# EAGLE board SparkFun_Air_Quality_ENS160-Panel (EAGLE 9.6.2), part 1 of 4
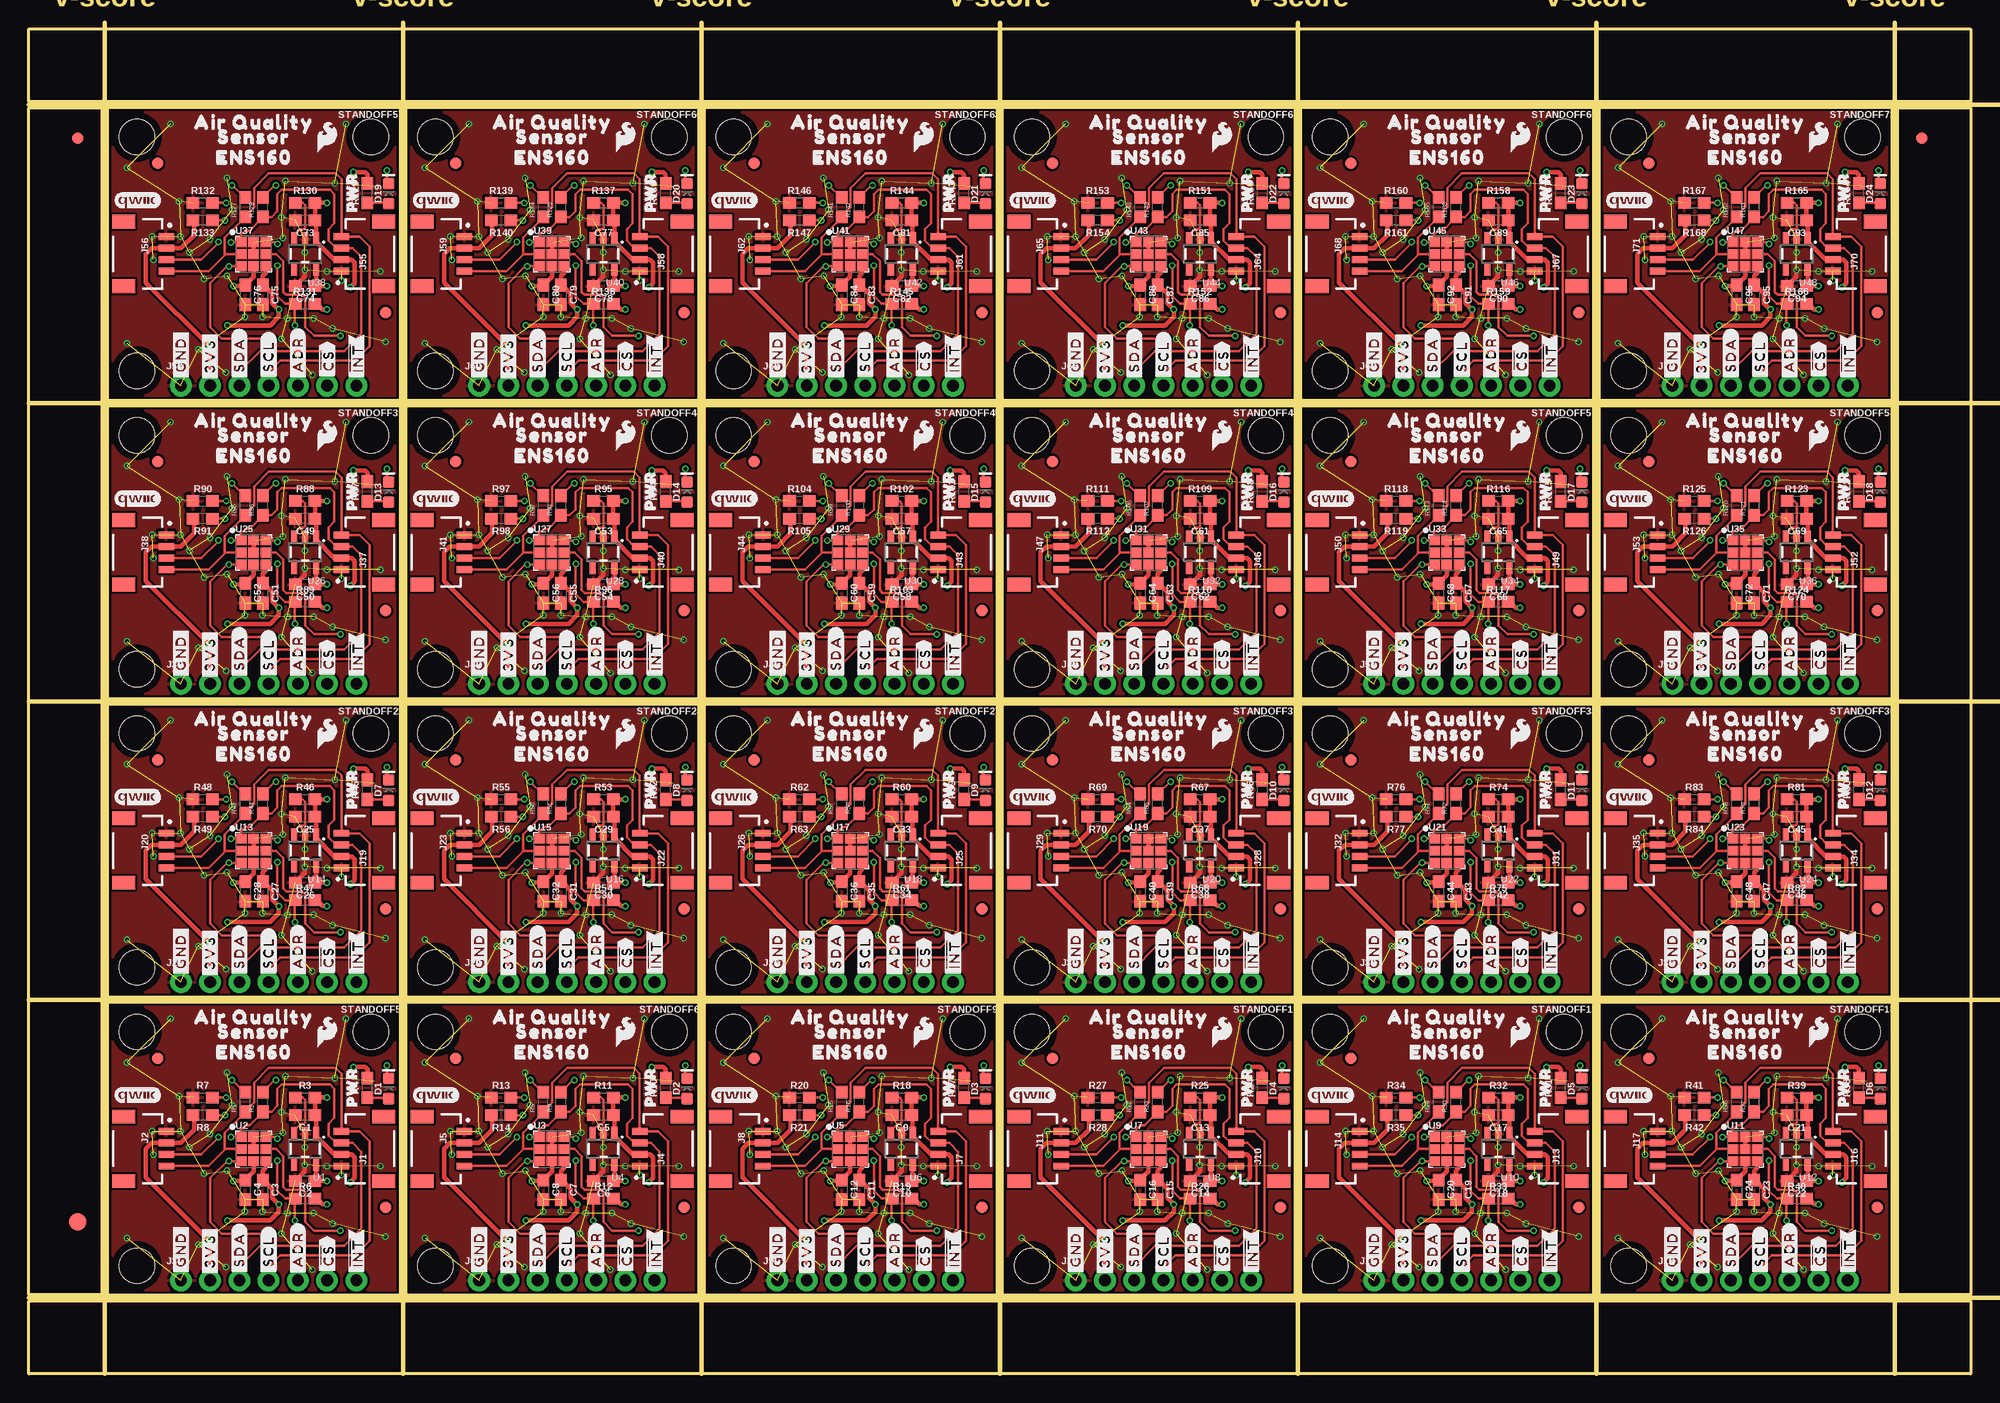
[diagram p0: board, top side]
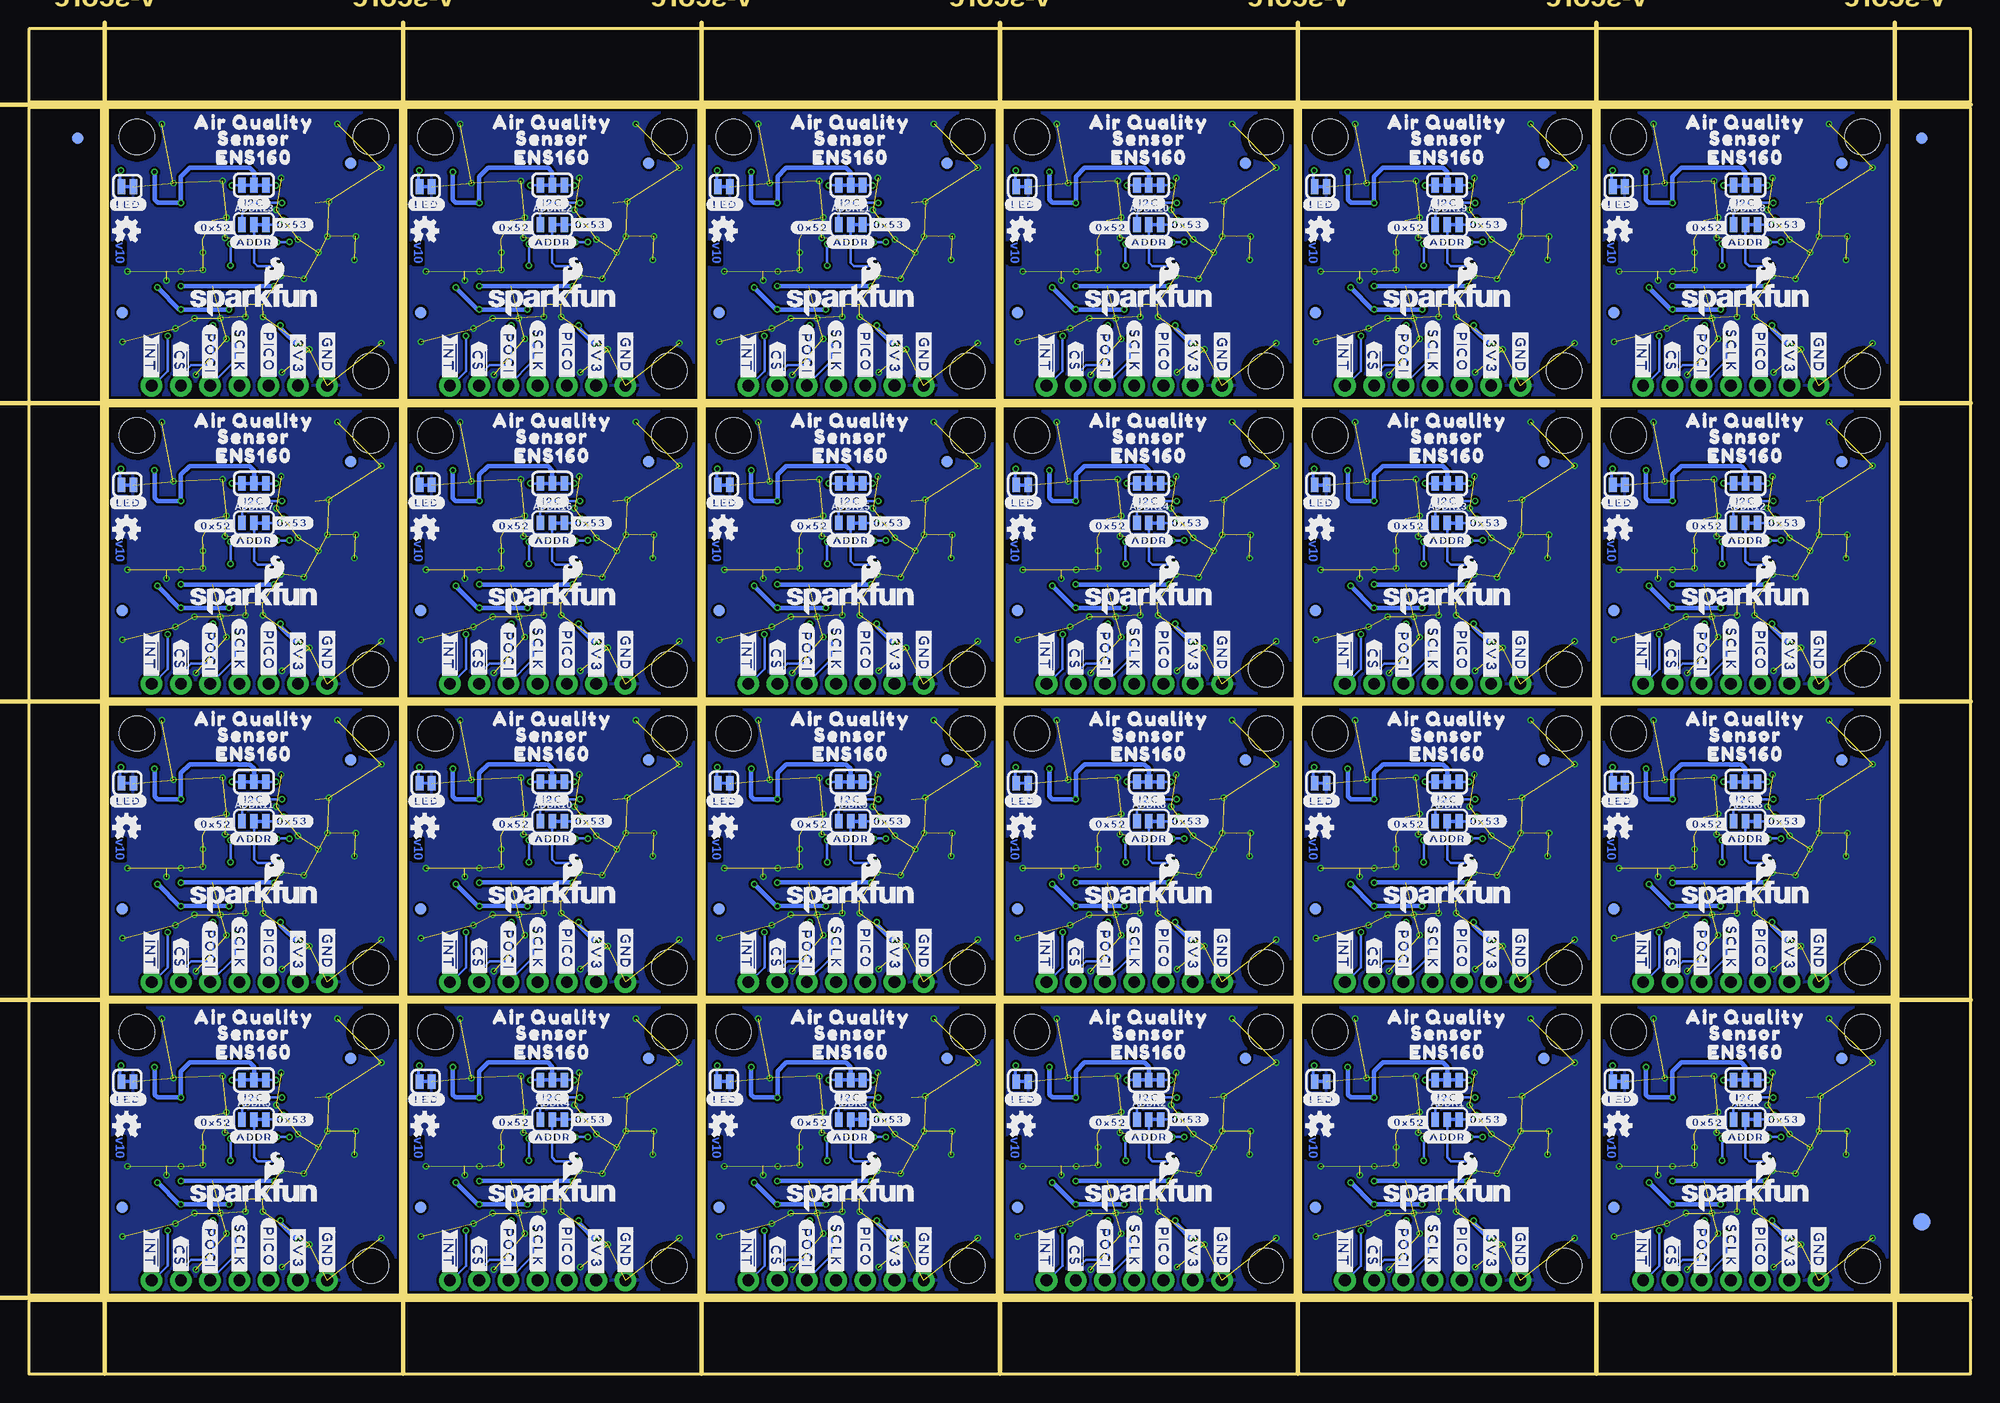
[diagram p1: board, bottom side, seen from below]

Size 168.66 x 116.84 mm. Coordinates in mm from the lower left corner, seen from the top.
Outline: 32.26,32.26 6.86,32.26 6.86,6.86 32.26,6.86 32.26,32.26
Outline: 58.17,32.26 32.77,32.26 32.77,6.86 58.17,6.86 58.17,32.26
Outline: 84.07,32.26 58.67,32.26 58.67,6.86 84.07,6.86 84.07,32.26
Outline: 109.98,32.26 84.58,32.26 84.58,6.86 109.98,6.86 109.98,32.26
Outline: 135.89,32.26 110.49,32.26 110.49,6.86 135.89,6.86 135.89,32.26
Outline: 161.8,32.26 136.4,32.26 136.4,6.86 161.8,6.86 161.8,32.26
Outline: 32.26,58.17 6.86,58.17 6.86,32.77 32.26,32.77 32.26,58.17
Outline: 58.17,58.17 32.77,58.17 32.77,32.77 58.17,32.77 58.17,58.17
Outline: 84.07,58.17 58.67,58.17 58.67,32.77 84.07,32.77 84.07,58.17
Outline: 109.98,58.17 84.58,58.17 84.58,32.77 109.98,32.77 109.98,58.17
Outline: 135.89,58.17 110.49,58.17 110.49,32.77 135.89,32.77 135.89,58.17
Outline: 161.8,58.17 136.4,58.17 136.4,32.77 161.8,32.77 161.8,58.17
Outline: 32.26,84.07 6.86,84.07 6.86,58.67 32.26,58.67 32.26,84.07
Outline: 58.17,84.07 32.77,84.07 32.77,58.67 58.17,58.67 58.17,84.07
Outline: 84.07,84.07 58.67,84.07 58.67,58.67 84.07,58.67 84.07,84.07
Outline: 109.98,84.07 84.58,84.07 84.58,58.67 109.98,58.67 109.98,84.07
Outline: 135.89,84.07 110.49,84.07 110.49,58.67 135.89,58.67 135.89,84.07
Outline: 161.8,84.07 136.4,84.07 136.4,58.67 161.8,58.67 161.8,84.07
Outline: 32.26,109.98 6.86,109.98 6.86,84.58 32.26,84.58 32.26,109.98
Outline: 58.17,109.98 32.77,109.98 32.77,84.58 58.17,84.58 58.17,109.98
Outline: 84.07,109.98 58.67,109.98 58.67,84.58 84.07,84.58 84.07,109.98
Outline: 109.98,109.98 84.58,109.98 84.58,84.58 109.98,84.58 109.98,109.98
Outline: 135.89,109.98 110.49,109.98 110.49,84.58 135.89,84.58 135.89,109.98
Outline: 161.8,109.98 136.4,109.98 136.4,84.58 161.8,84.58 161.8,109.98
Outline: 0,6.35 168.66,6.35 168.66,0 0,0 0,6.35
Outline: 162.31,109.98 168.66,109.98 168.66,6.86 162.31,6.86 162.31,109.98
Outline: 0,116.84 168.66,116.84 168.66,110.49 0,110.49 0,116.84
Outline: 0,109.98 6.35,109.98 6.35,6.86 0,6.86 0,109.98
Copper layers (1*16): Top 0.035mm / dielectric 1.5mm / Bottom 0.035mm
Design rules "SparkFun_Air_Quality_ENS160": minimum track width 5mil, minimum drill 0.3mm, track to track 5mil, track to pad 5mil, pad to pad 5mil, via to via 5mil, smd to smd 5mil, copper to edge 7mil, drill to drill 7mil, minimum pad ring 5mil, minimum via ring 5mil, stop-mask expansion 2.5mil, vias tented up to drill 25mil, thermal gap 10mil
Milling: 12 lines

## Footprints (pad centres in the part's own frame; a part is rotated, then mirrored left to right if it is on the bottom)
SMT-JUMPER_3_1-NC_TRACE_SILK = smd 0.66 x 1.27: 1 -1.041,0; 2 0,0; 3 1.041,0
0603 = smd 1.1 x 1: 1 -0.85,0; 2 0.85,0
LED-0603 = smd 1 x 1: A -0.877,0; C 0.877,0
FIDUCIAL-1X2 = smd 1 x 1: 1 0,0
FIDUCIAL-1.5X3 = smd 1.5 x 1.5: 1 0,0
SMT-JUMPER_3_2-NC_TRACE_SILK = smd 0.66 x 1.27: 1 -1.041,0; 2 0,0; 3 1.041,0
JST04_1MM_RA = smd 0.6 x 1.35: 1 -1.5,0; 2 -0.5,0; 3 0.5,0; 4 1.5,0 | smd 1.2 x 2: NC1 2.8,-3.675; NC2 -2.8,-3.675
1X07_NO_SILK = drill 1.016 pad 1.88: 1 0,0; 2 2.54,0; 3 5.08,0; 4 7.62,0; 5 10.16,0; 6 12.7,0; 7 15.24,0
SMT-JUMPER_2_NC_TRACE_SILK = smd 0.66 x 1.27: 1 -0.521,0; 2 0.521,0
STAND-OFF-TIGHT = hole 3.048: 0,0
SOT23-5 = smd 0.55 x 1.2: 1 -0.95,-1.3; 2 0,-1.3; 3 0.95,-1.3; 4 0.95,1.3; 5 -0.95,1.3
LGA-9 = smd 0.9 x 0.85: P1 -1.085,1.03; P2 -1.085,-0.02; P3 -1.085,-1.07; P4 -0.035,-1.07; P5 1.015,-1.07; P6 1.015,-0.02; P7 1.015,1.03; P8 -0.035,1.03; P9 -0.035,-0.02

## Placement (x,y rotation side)
ADDR  JUMPER-SMT_3_1-NC_TRACE_SILK  [SMT-JUMPER_3_1-NC_TRACE_SILK]  19.56,22.1 0 bottom
ADDR1  JUMPER-SMT_3_1-NC_TRACE_SILK  [SMT-JUMPER_3_1-NC_TRACE_SILK]  45.47,22.1 0 bottom
ADDR2  JUMPER-SMT_3_1-NC_TRACE_SILK  [SMT-JUMPER_3_1-NC_TRACE_SILK]  71.37,22.1 0 bottom
ADDR3  JUMPER-SMT_3_1-NC_TRACE_SILK  [SMT-JUMPER_3_1-NC_TRACE_SILK]  97.28,22.1 0 bottom
ADDR4  JUMPER-SMT_3_1-NC_TRACE_SILK  [SMT-JUMPER_3_1-NC_TRACE_SILK]  123.19,22.1 0 bottom
ADDR5  JUMPER-SMT_3_1-NC_TRACE_SILK  [SMT-JUMPER_3_1-NC_TRACE_SILK]  149.1,22.1 0 bottom
ADDR6  JUMPER-SMT_3_1-NC_TRACE_SILK  [SMT-JUMPER_3_1-NC_TRACE_SILK]  19.56,48.01 0 bottom
ADDR7  JUMPER-SMT_3_1-NC_TRACE_SILK  [SMT-JUMPER_3_1-NC_TRACE_SILK]  45.47,48.01 0 bottom
ADDR8  JUMPER-SMT_3_1-NC_TRACE_SILK  [SMT-JUMPER_3_1-NC_TRACE_SILK]  71.37,48.01 0 bottom
ADDR9  JUMPER-SMT_3_1-NC_TRACE_SILK  [SMT-JUMPER_3_1-NC_TRACE_SILK]  97.28,48.01 0 bottom
ADDR10  JUMPER-SMT_3_1-NC_TRACE_SILK  [SMT-JUMPER_3_1-NC_TRACE_SILK]  123.19,48.01 0 bottom
ADDR11  JUMPER-SMT_3_1-NC_TRACE_SILK  [SMT-JUMPER_3_1-NC_TRACE_SILK]  149.1,48.01 0 bottom
ADDR12  JUMPER-SMT_3_1-NC_TRACE_SILK  [SMT-JUMPER_3_1-NC_TRACE_SILK]  19.56,73.91 0 bottom
ADDR13  JUMPER-SMT_3_1-NC_TRACE_SILK  [SMT-JUMPER_3_1-NC_TRACE_SILK]  45.47,73.91 0 bottom
ADDR14  JUMPER-SMT_3_1-NC_TRACE_SILK  [SMT-JUMPER_3_1-NC_TRACE_SILK]  71.37,73.91 0 bottom
ADDR15  JUMPER-SMT_3_1-NC_TRACE_SILK  [SMT-JUMPER_3_1-NC_TRACE_SILK]  97.28,73.91 0 bottom
ADDR16  JUMPER-SMT_3_1-NC_TRACE_SILK  [SMT-JUMPER_3_1-NC_TRACE_SILK]  123.19,73.91 0 bottom
ADDR17  JUMPER-SMT_3_1-NC_TRACE_SILK  [SMT-JUMPER_3_1-NC_TRACE_SILK]  149.1,73.91 0 bottom
ADDR18  JUMPER-SMT_3_1-NC_TRACE_SILK  [SMT-JUMPER_3_1-NC_TRACE_SILK]  19.56,99.82 0 bottom
ADDR19  JUMPER-SMT_3_1-NC_TRACE_SILK  [SMT-JUMPER_3_1-NC_TRACE_SILK]  45.47,99.82 0 bottom
ADDR20  JUMPER-SMT_3_1-NC_TRACE_SILK  [SMT-JUMPER_3_1-NC_TRACE_SILK]  71.37,99.82 0 bottom
ADDR21  JUMPER-SMT_3_1-NC_TRACE_SILK  [SMT-JUMPER_3_1-NC_TRACE_SILK]  97.28,99.82 0 bottom
ADDR22  JUMPER-SMT_3_1-NC_TRACE_SILK  [SMT-JUMPER_3_1-NC_TRACE_SILK]  123.19,99.82 0 bottom
ADDR23  JUMPER-SMT_3_1-NC_TRACE_SILK  [SMT-JUMPER_3_1-NC_TRACE_SILK]  149.1,99.82 0 bottom
C1  1.0uF  [0603]  24,22.48 180 top
C2  1.0uF  [0603]  24,16.76 180 top
C3  0.1uF  [0603]  20.32,16 270 top
C4  10uF  [0603]  18.8,16 270 top
C5  1.0uF  [0603]  49.91,22.48 180 top
C6  1.0uF  [0603]  49.91,16.76 180 top
C7  0.1uF  [0603]  46.23,16 270 top
C8  10uF  [0603]  44.7,16 270 top
C9  1.0uF  [0603]  75.82,22.48 180 top
C10  1.0uF  [0603]  75.82,16.76 180 top
C11  0.1uF  [0603]  72.14,16 270 top
C12  10uF  [0603]  70.61,16 270 top
C13  1.0uF  [0603]  101.73,22.48 180 top
C14  1.0uF  [0603]  101.73,16.76 180 top
C15  0.1uF  [0603]  98.04,16 270 top
C16  10uF  [0603]  96.52,16 270 top
C17  1.0uF  [0603]  127.64,22.48 180 top
C18  1.0uF  [0603]  127.64,16.76 180 top
C19  0.1uF  [0603]  123.95,16 270 top
C20  10uF  [0603]  122.43,16 270 top
C21  1.0uF  [0603]  153.54,22.48 180 top
C22  1.0uF  [0603]  153.54,16.76 180 top
C23  0.1uF  [0603]  149.86,16 270 top
C24  10uF  [0603]  148.34,16 270 top
C25  1.0uF  [0603]  24,48.39 180 top
C26  1.0uF  [0603]  24,42.67 180 top
C27  0.1uF  [0603]  20.32,41.91 270 top
C28  10uF  [0603]  18.8,41.91 270 top
C29  1.0uF  [0603]  49.91,48.39 180 top
C30  1.0uF  [0603]  49.91,42.67 180 top
C31  0.1uF  [0603]  46.23,41.91 270 top
C32  10uF  [0603]  44.7,41.91 270 top
C33  1.0uF  [0603]  75.82,48.39 180 top
C34  1.0uF  [0603]  75.82,42.67 180 top
C35  0.1uF  [0603]  72.14,41.91 270 top
C36  10uF  [0603]  70.61,41.91 270 top
C37  1.0uF  [0603]  101.73,48.39 180 top
C38  1.0uF  [0603]  101.73,42.67 180 top
C39  0.1uF  [0603]  98.04,41.91 270 top
C40  10uF  [0603]  96.52,41.91 270 top
C41  1.0uF  [0603]  127.64,48.39 180 top
C42  1.0uF  [0603]  127.64,42.67 180 top
C43  0.1uF  [0603]  123.95,41.91 270 top
C44  10uF  [0603]  122.43,41.91 270 top
C45  1.0uF  [0603]  153.54,48.39 180 top
C46  1.0uF  [0603]  153.54,42.67 180 top
C47  0.1uF  [0603]  149.86,41.91 270 top
C48  10uF  [0603]  148.34,41.91 270 top
C49  1.0uF  [0603]  24,74.3 180 top
C50  1.0uF  [0603]  24,68.58 180 top
C51  0.1uF  [0603]  20.32,67.82 270 top
C52  10uF  [0603]  18.8,67.82 270 top
C53  1.0uF  [0603]  49.91,74.3 180 top
C54  1.0uF  [0603]  49.91,68.58 180 top
C55  0.1uF  [0603]  46.23,67.82 270 top
C56  10uF  [0603]  44.7,67.82 270 top
C57  1.0uF  [0603]  75.82,74.3 180 top
C58  1.0uF  [0603]  75.82,68.58 180 top
C59  0.1uF  [0603]  72.14,67.82 270 top
C60  10uF  [0603]  70.61,67.82 270 top
C61  1.0uF  [0603]  101.73,74.3 180 top
C62  1.0uF  [0603]  101.73,68.58 180 top
C63  0.1uF  [0603]  98.04,67.82 270 top
C64  10uF  [0603]  96.52,67.82 270 top
C65  1.0uF  [0603]  127.64,74.3 180 top
C66  1.0uF  [0603]  127.64,68.58 180 top
C67  0.1uF  [0603]  123.95,67.82 270 top
C68  10uF  [0603]  122.43,67.82 270 top
C69  1.0uF  [0603]  153.54,74.3 180 top
C70  1.0uF  [0603]  153.54,68.58 180 top
C71  0.1uF  [0603]  149.86,67.82 270 top
C72  10uF  [0603]  148.34,67.82 270 top
C73  1.0uF  [0603]  24,100.2 180 top
C74  1.0uF  [0603]  24,94.49 180 top
C75  0.1uF  [0603]  20.32,93.73 270 top
C76  10uF  [0603]  18.8,93.73 270 top
C77  1.0uF  [0603]  49.91,100.2 180 top
C78  1.0uF  [0603]  49.91,94.49 180 top
C79  0.1uF  [0603]  46.23,93.73 270 top
C80  10uF  [0603]  44.7,93.73 270 top
C81  1.0uF  [0603]  75.82,100.2 180 top
C82  1.0uF  [0603]  75.82,94.49 180 top
C83  0.1uF  [0603]  72.14,93.73 270 top
C84  10uF  [0603]  70.61,93.73 270 top
C85  1.0uF  [0603]  101.73,100.2 180 top
C86  1.0uF  [0603]  101.73,94.49 180 top
C87  0.1uF  [0603]  98.04,93.73 270 top
C88  10uF  [0603]  96.52,93.73 270 top
C89  1.0uF  [0603]  127.64,100.2 180 top
C90  1.0uF  [0603]  127.64,94.49 180 top
C91  0.1uF  [0603]  123.95,93.73 270 top
C92  10uF  [0603]  122.43,93.73 270 top
C93  1.0uF  [0603]  153.54,100.2 180 top
C94  1.0uF  [0603]  153.54,94.49 180 top
C95  0.1uF  [0603]  149.86,93.73 270 top
C96  10uF  [0603]  148.34,93.73 270 top
D1  RED  [LED-0603]  31.27,24.79 90 top
D2  RED  [LED-0603]  57.18,24.79 90 top
D3  RED  [LED-0603]  83.08,24.79 90 top
D4  RED  [LED-0603]  108.99,24.79 90 top
D5  RED  [LED-0603]  134.9,24.79 90 top
D6  RED  [LED-0603]  160.81,24.79 90 top
D7  RED  [LED-0603]  31.27,50.7 90 top
D8  RED  [LED-0603]  57.18,50.7 90 top
D9  RED  [LED-0603]  83.08,50.7 90 top
D10  RED  [LED-0603]  108.99,50.7 90 top
D11  RED  [LED-0603]  134.9,50.7 90 top
D12  RED  [LED-0603]  160.81,50.7 90 top
D13  RED  [LED-0603]  31.27,76.61 90 top
D14  RED  [LED-0603]  57.18,76.61 90 top
D15  RED  [LED-0603]  83.08,76.61 90 top
D16  RED  [LED-0603]  108.99,76.61 90 top
D17  RED  [LED-0603]  134.9,76.61 90 top
D18  RED  [LED-0603]  160.81,76.61 90 top
D19  RED  [LED-0603]  31.27,102.51 90 top
D20  RED  [LED-0603]  57.18,102.51 90 top
D21  RED  [LED-0603]  83.08,102.51 90 top
D22  RED  [LED-0603]  108.99,102.51 90 top
D23  RED  [LED-0603]  134.9,102.51 90 top
D24  RED  [LED-0603]  160.81,102.51 90 top
E$1  [FIDUCIAL-1X2]  4.23,107.31 0 top
E$2  [FIDUCIAL-1X2]  4.23,107.31 0 bottom
E$3  [FIDUCIAL-1X2]  164.42,107.31 0 top
E$4  [FIDUCIAL-1X2]  164.42,107.31 0 bottom
E$5  [FIDUCIAL-1.5X3]  4.23,13.21 0 top
E$6  [FIDUCIAL-1.5X3]  4.23,13.21 0 bottom
FD1  FIDUCIAL1X2  [FIDUCIAL-1X2]  11.18,27.43 0 bottom
FD2  FIDUCIAL1X2  [FIDUCIAL-1X2]  30.99,14.48 0 bottom
FD3  FIDUCIAL1X2  [FIDUCIAL-1X2]  11.18,27.43 0 top
FD4  FIDUCIAL1X2  [FIDUCIAL-1X2]  30.99,14.48 0 top
FD5  FIDUCIAL1X2  [FIDUCIAL-1X2]  37.08,27.43 0 bottom
FD6  FIDUCIAL1X2  [FIDUCIAL-1X2]  56.9,14.48 0 bottom
FD7  FIDUCIAL1X2  [FIDUCIAL-1X2]  37.08,27.43 0 top
FD8  FIDUCIAL1X2  [FIDUCIAL-1X2]  56.9,14.48 0 top
FD9  FIDUCIAL1X2  [FIDUCIAL-1X2]  62.99,27.43 0 bottom
FD10  FIDUCIAL1X2  [FIDUCIAL-1X2]  82.8,14.48 0 bottom
FD11  FIDUCIAL1X2  [FIDUCIAL-1X2]  62.99,27.43 0 top
FD12  FIDUCIAL1X2  [FIDUCIAL-1X2]  82.8,14.48 0 top
FD13  FIDUCIAL1X2  [FIDUCIAL-1X2]  88.9,27.43 0 bottom
FD14  FIDUCIAL1X2  [FIDUCIAL-1X2]  108.71,14.48 0 bottom
FD15  FIDUCIAL1X2  [FIDUCIAL-1X2]  88.9,27.43 0 top
FD16  FIDUCIAL1X2  [FIDUCIAL-1X2]  108.71,14.48 0 top
FD17  FIDUCIAL1X2  [FIDUCIAL-1X2]  114.81,27.43 0 bottom
FD18  FIDUCIAL1X2  [FIDUCIAL-1X2]  134.62,14.48 0 bottom
FD19  FIDUCIAL1X2  [FIDUCIAL-1X2]  114.81,27.43 0 top
FD20  FIDUCIAL1X2  [FIDUCIAL-1X2]  134.62,14.48 0 top
FD21  FIDUCIAL1X2  [FIDUCIAL-1X2]  140.72,27.43 0 bottom
FD22  FIDUCIAL1X2  [FIDUCIAL-1X2]  160.53,14.48 0 bottom
FD23  FIDUCIAL1X2  [FIDUCIAL-1X2]  140.72,27.43 0 top
FD24  FIDUCIAL1X2  [FIDUCIAL-1X2]  160.53,14.48 0 top
FD25  FIDUCIAL1X2  [FIDUCIAL-1X2]  11.18,53.34 0 bottom
FD26  FIDUCIAL1X2  [FIDUCIAL-1X2]  30.99,40.39 0 bottom
FD27  FIDUCIAL1X2  [FIDUCIAL-1X2]  11.18,53.34 0 top
FD28  FIDUCIAL1X2  [FIDUCIAL-1X2]  30.99,40.39 0 top
FD29  FIDUCIAL1X2  [FIDUCIAL-1X2]  37.08,53.34 0 bottom
FD30  FIDUCIAL1X2  [FIDUCIAL-1X2]  56.9,40.39 0 bottom
FD31  FIDUCIAL1X2  [FIDUCIAL-1X2]  37.08,53.34 0 top
FD32  FIDUCIAL1X2  [FIDUCIAL-1X2]  56.9,40.39 0 top
FD33  FIDUCIAL1X2  [FIDUCIAL-1X2]  62.99,53.34 0 bottom
FD34  FIDUCIAL1X2  [FIDUCIAL-1X2]  82.8,40.39 0 bottom
FD35  FIDUCIAL1X2  [FIDUCIAL-1X2]  62.99,53.34 0 top
FD36  FIDUCIAL1X2  [FIDUCIAL-1X2]  82.8,40.39 0 top
FD37  FIDUCIAL1X2  [FIDUCIAL-1X2]  88.9,53.34 0 bottom
FD38  FIDUCIAL1X2  [FIDUCIAL-1X2]  108.71,40.39 0 bottom
FD39  FIDUCIAL1X2  [FIDUCIAL-1X2]  88.9,53.34 0 top
FD40  FIDUCIAL1X2  [FIDUCIAL-1X2]  108.71,40.39 0 top
FD41  FIDUCIAL1X2  [FIDUCIAL-1X2]  114.81,53.34 0 bottom
FD42  FIDUCIAL1X2  [FIDUCIAL-1X2]  134.62,40.39 0 bottom
FD43  FIDUCIAL1X2  [FIDUCIAL-1X2]  114.81,53.34 0 top
FD44  FIDUCIAL1X2  [FIDUCIAL-1X2]  134.62,40.39 0 top
FD45  FIDUCIAL1X2  [FIDUCIAL-1X2]  140.72,53.34 0 bottom
FD46  FIDUCIAL1X2  [FIDUCIAL-1X2]  160.53,40.39 0 bottom
FD47  FIDUCIAL1X2  [FIDUCIAL-1X2]  140.72,53.34 0 top
FD48  FIDUCIAL1X2  [FIDUCIAL-1X2]  160.53,40.39 0 top
FD49  FIDUCIAL1X2  [FIDUCIAL-1X2]  11.18,79.25 0 bottom
FD50  FIDUCIAL1X2  [FIDUCIAL-1X2]  30.99,66.29 0 bottom
FD51  FIDUCIAL1X2  [FIDUCIAL-1X2]  11.18,79.25 0 top
FD52  FIDUCIAL1X2  [FIDUCIAL-1X2]  30.99,66.29 0 top
FD53  FIDUCIAL1X2  [FIDUCIAL-1X2]  37.08,79.25 0 bottom
FD54  FIDUCIAL1X2  [FIDUCIAL-1X2]  56.9,66.29 0 bottom
FD55  FIDUCIAL1X2  [FIDUCIAL-1X2]  37.08,79.25 0 top
FD56  FIDUCIAL1X2  [FIDUCIAL-1X2]  56.9,66.29 0 top
FD57  FIDUCIAL1X2  [FIDUCIAL-1X2]  62.99,79.25 0 bottom
FD58  FIDUCIAL1X2  [FIDUCIAL-1X2]  82.8,66.29 0 bottom
FD59  FIDUCIAL1X2  [FIDUCIAL-1X2]  62.99,79.25 0 top
FD60  FIDUCIAL1X2  [FIDUCIAL-1X2]  82.8,66.29 0 top
FD61  FIDUCIAL1X2  [FIDUCIAL-1X2]  88.9,79.25 0 bottom
FD62  FIDUCIAL1X2  [FIDUCIAL-1X2]  108.71,66.29 0 bottom
FD63  FIDUCIAL1X2  [FIDUCIAL-1X2]  88.9,79.25 0 top
FD64  FIDUCIAL1X2  [FIDUCIAL-1X2]  108.71,66.29 0 top
FD65  FIDUCIAL1X2  [FIDUCIAL-1X2]  114.81,79.25 0 bottom
FD66  FIDUCIAL1X2  [FIDUCIAL-1X2]  134.62,66.29 0 bottom
FD67  FIDUCIAL1X2  [FIDUCIAL-1X2]  114.81,79.25 0 top
FD68  FIDUCIAL1X2  [FIDUCIAL-1X2]  134.62,66.29 0 top
FD69  FIDUCIAL1X2  [FIDUCIAL-1X2]  140.72,79.25 0 bottom
FD70  FIDUCIAL1X2  [FIDUCIAL-1X2]  160.53,66.29 0 bottom
FD71  FIDUCIAL1X2  [FIDUCIAL-1X2]  140.72,79.25 0 top
FD72  FIDUCIAL1X2  [FIDUCIAL-1X2]  160.53,66.29 0 top
FD73  FIDUCIAL1X2  [FIDUCIAL-1X2]  11.18,105.16 0 bottom
FD74  FIDUCIAL1X2  [FIDUCIAL-1X2]  30.99,92.2 0 bottom
FD75  FIDUCIAL1X2  [FIDUCIAL-1X2]  11.18,105.16 0 top
FD76  FIDUCIAL1X2  [FIDUCIAL-1X2]  30.99,92.2 0 top
FD77  FIDUCIAL1X2  [FIDUCIAL-1X2]  37.08,105.16 0 bottom
FD78  FIDUCIAL1X2  [FIDUCIAL-1X2]  56.9,92.2 0 bottom
FD79  FIDUCIAL1X2  [FIDUCIAL-1X2]  37.08,105.16 0 top
FD80  FIDUCIAL1X2  [FIDUCIAL-1X2]  56.9,92.2 0 top
FD81  FIDUCIAL1X2  [FIDUCIAL-1X2]  62.99,105.16 0 bottom
FD82  FIDUCIAL1X2  [FIDUCIAL-1X2]  82.8,92.2 0 bottom
FD83  FIDUCIAL1X2  [FIDUCIAL-1X2]  62.99,105.16 0 top
FD84  FIDUCIAL1X2  [FIDUCIAL-1X2]  82.8,92.2 0 top
FD85  FIDUCIAL1X2  [FIDUCIAL-1X2]  88.9,105.16 0 bottom
FD86  FIDUCIAL1X2  [FIDUCIAL-1X2]  108.71,92.2 0 bottom
FD87  FIDUCIAL1X2  [FIDUCIAL-1X2]  88.9,105.16 0 top
FD88  FIDUCIAL1X2  [FIDUCIAL-1X2]  108.71,92.2 0 top
FD89  FIDUCIAL1X2  [FIDUCIAL-1X2]  114.81,105.16 0 bottom
FD90  FIDUCIAL1X2  [FIDUCIAL-1X2]  134.62,92.2 0 bottom
FD91  FIDUCIAL1X2  [FIDUCIAL-1X2]  114.81,105.16 0 top
FD92  FIDUCIAL1X2  [FIDUCIAL-1X2]  134.62,92.2 0 top
FD93  FIDUCIAL1X2  [FIDUCIAL-1X2]  140.72,105.16 0 bottom
FD94  FIDUCIAL1X2  [FIDUCIAL-1X2]  160.53,92.2 0 bottom
FD95  FIDUCIAL1X2  [FIDUCIAL-1X2]  140.72,105.16 0 top
FD96  FIDUCIAL1X2  [FIDUCIAL-1X2]  160.53,92.2 0 top
I2C_PU  S_MODE  [SMT-JUMPER_3_2-NC_TRACE_SILK]  19.56,25.53 180 bottom
I2C_PU1  S_MODE  [SMT-JUMPER_3_2-NC_TRACE_SILK]  45.47,25.53 180 bottom
I2C_PU2  S_MODE  [SMT-JUMPER_3_2-NC_TRACE_SILK]  71.37,25.53 180 bottom
I2C_PU3  S_MODE  [SMT-JUMPER_3_2-NC_TRACE_SILK]  97.28,25.53 180 bottom
I2C_PU4  S_MODE  [SMT-JUMPER_3_2-NC_TRACE_SILK]  123.19,25.53 180 bottom
I2C_PU5  S_MODE  [SMT-JUMPER_3_2-NC_TRACE_SILK]  149.1,25.53 180 bottom
I2C_PU6  S_MODE  [SMT-JUMPER_3_2-NC_TRACE_SILK]  19.56,51.43 180 bottom
I2C_PU7  S_MODE  [SMT-JUMPER_3_2-NC_TRACE_SILK]  45.47,51.43 180 bottom
I2C_PU8  S_MODE  [SMT-JUMPER_3_2-NC_TRACE_SILK]  71.37,51.43 180 bottom
I2C_PU9  S_MODE  [SMT-JUMPER_3_2-NC_TRACE_SILK]  97.28,51.43 180 bottom
I2C_PU10  S_MODE  [SMT-JUMPER_3_2-NC_TRACE_SILK]  123.19,51.43 180 bottom
I2C_PU11  S_MODE  [SMT-JUMPER_3_2-NC_TRACE_SILK]  149.1,51.43 180 bottom
I2C_PU12  S_MODE  [SMT-JUMPER_3_2-NC_TRACE_SILK]  19.56,77.34 180 bottom
I2C_PU13  S_MODE  [SMT-JUMPER_3_2-NC_TRACE_SILK]  45.47,77.34 180 bottom
I2C_PU14  S_MODE  [SMT-JUMPER_3_2-NC_TRACE_SILK]  71.37,77.34 180 bottom
I2C_PU15  S_MODE  [SMT-JUMPER_3_2-NC_TRACE_SILK]  97.28,77.34 180 bottom
I2C_PU16  S_MODE  [SMT-JUMPER_3_2-NC_TRACE_SILK]  123.19,77.34 180 bottom
I2C_PU17  S_MODE  [SMT-JUMPER_3_2-NC_TRACE_SILK]  149.1,77.34 180 bottom
I2C_PU18  S_MODE  [SMT-JUMPER_3_2-NC_TRACE_SILK]  19.56,103.25 180 bottom
I2C_PU19  S_MODE  [SMT-JUMPER_3_2-NC_TRACE_SILK]  45.47,103.25 180 bottom
I2C_PU20  S_MODE  [SMT-JUMPER_3_2-NC_TRACE_SILK]  71.37,103.25 180 bottom
I2C_PU21  S_MODE  [SMT-JUMPER_3_2-NC_TRACE_SILK]  97.28,103.25 180 bottom
I2C_PU22  S_MODE  [SMT-JUMPER_3_2-NC_TRACE_SILK]  123.19,103.25 180 bottom
I2C_PU23  S_MODE  [SMT-JUMPER_3_2-NC_TRACE_SILK]  149.1,103.25 180 bottom
J1  QWIIC_RIGHT_ANGLE  [JST04_1MM_RA]  27.15,19.56 90 top
J2  QWIIC_RIGHT_ANGLE  [JST04_1MM_RA]  11.94,19.56 270 top
J3  [1X07_NO_SILK]  13.21,8.13 0 top
J4  QWIIC_RIGHT_ANGLE  [JST04_1MM_RA]  53.06,19.56 90 top
J5  QWIIC_RIGHT_ANGLE  [JST04_1MM_RA]  37.85,19.56 270 top
J6  [1X07_NO_SILK]  39.12,8.13 0 top
J7  QWIIC_RIGHT_ANGLE  [JST04_1MM_RA]  78.97,19.56 90 top
J8  QWIIC_RIGHT_ANGLE  [JST04_1MM_RA]  63.75,19.56 270 top
J9  [1X07_NO_SILK]  65.02,8.13 0 top
J10  QWIIC_RIGHT_ANGLE  [JST04_1MM_RA]  104.88,19.56 90 top
J11  QWIIC_RIGHT_ANGLE  [JST04_1MM_RA]  89.66,19.56 270 top
J12  [1X07_NO_SILK]  90.93,8.13 0 top
J13  QWIIC_RIGHT_ANGLE  [JST04_1MM_RA]  130.78,19.56 90 top
J14  QWIIC_RIGHT_ANGLE  [JST04_1MM_RA]  115.57,19.56 270 top
J15  [1X07_NO_SILK]  116.84,8.13 0 top
J16  QWIIC_RIGHT_ANGLE  [JST04_1MM_RA]  156.69,19.56 90 top
J17  QWIIC_RIGHT_ANGLE  [JST04_1MM_RA]  141.48,19.56 270 top
J18  [1X07_NO_SILK]  142.75,8.13 0 top
J19  QWIIC_RIGHT_ANGLE  [JST04_1MM_RA]  27.15,45.47 90 top
J20  QWIIC_RIGHT_ANGLE  [JST04_1MM_RA]  11.94,45.47 270 top
J21  [1X07_NO_SILK]  13.21,34.04 0 top
J22  QWIIC_RIGHT_ANGLE  [JST04_1MM_RA]  53.06,45.47 90 top
J23  QWIIC_RIGHT_ANGLE  [JST04_1MM_RA]  37.85,45.47 270 top
J24  [1X07_NO_SILK]  39.12,34.04 0 top
J25  QWIIC_RIGHT_ANGLE  [JST04_1MM_RA]  78.97,45.47 90 top
J26  QWIIC_RIGHT_ANGLE  [JST04_1MM_RA]  63.75,45.47 270 top
J27  [1X07_NO_SILK]  65.02,34.04 0 top
J28  QWIIC_RIGHT_ANGLE  [JST04_1MM_RA]  104.88,45.47 90 top
J29  QWIIC_RIGHT_ANGLE  [JST04_1MM_RA]  89.66,45.47 270 top
J30  [1X07_NO_SILK]  90.93,34.04 0 top
J31  QWIIC_RIGHT_ANGLE  [JST04_1MM_RA]  130.78,45.47 90 top
J32  QWIIC_RIGHT_ANGLE  [JST04_1MM_RA]  115.57,45.47 270 top
J33  [1X07_NO_SILK]  116.84,34.04 0 top
J34  QWIIC_RIGHT_ANGLE  [JST04_1MM_RA]  156.69,45.47 90 top
J35  QWIIC_RIGHT_ANGLE  [JST04_1MM_RA]  141.48,45.47 270 top
J36  [1X07_NO_SILK]  142.75,34.04 0 top
J37  QWIIC_RIGHT_ANGLE  [JST04_1MM_RA]  27.15,71.37 90 top
J38  QWIIC_RIGHT_ANGLE  [JST04_1MM_RA]  11.94,71.37 270 top
J39  [1X07_NO_SILK]  13.21,59.94 0 top
J40  QWIIC_RIGHT_ANGLE  [JST04_1MM_RA]  53.06,71.37 90 top
J41  QWIIC_RIGHT_ANGLE  [JST04_1MM_RA]  37.85,71.37 270 top
J42  [1X07_NO_SILK]  39.12,59.94 0 top
J43  QWIIC_RIGHT_ANGLE  [JST04_1MM_RA]  78.97,71.37 90 top
J44  QWIIC_RIGHT_ANGLE  [JST04_1MM_RA]  63.75,71.37 270 top
J45  [1X07_NO_SILK]  65.02,59.94 0 top
J46  QWIIC_RIGHT_ANGLE  [JST04_1MM_RA]  104.88,71.37 90 top
J47  QWIIC_RIGHT_ANGLE  [JST04_1MM_RA]  89.66,71.37 270 top
J48  [1X07_NO_SILK]  90.93,59.94 0 top
J49  QWIIC_RIGHT_ANGLE  [JST04_1MM_RA]  130.78,71.37 90 top
J50  QWIIC_RIGHT_ANGLE  [JST04_1MM_RA]  115.57,71.37 270 top
J51  [1X07_NO_SILK]  116.84,59.94 0 top
J52  QWIIC_RIGHT_ANGLE  [JST04_1MM_RA]  156.69,71.37 90 top
J53  QWIIC_RIGHT_ANGLE  [JST04_1MM_RA]  141.48,71.37 270 top
J54  [1X07_NO_SILK]  142.75,59.94 0 top
J55  QWIIC_RIGHT_ANGLE  [JST04_1MM_RA]  27.15,97.28 90 top
J56  QWIIC_RIGHT_ANGLE  [JST04_1MM_RA]  11.94,97.28 270 top
J57  [1X07_NO_SILK]  13.21,85.85 0 top
J58  QWIIC_RIGHT_ANGLE  [JST04_1MM_RA]  53.06,97.28 90 top
J59  QWIIC_RIGHT_ANGLE  [JST04_1MM_RA]  37.85,97.28 270 top
J60  [1X07_NO_SILK]  39.12,85.85 0 top
J61  QWIIC_RIGHT_ANGLE  [JST04_1MM_RA]  78.97,97.28 90 top
J62  QWIIC_RIGHT_ANGLE  [JST04_1MM_RA]  63.75,97.28 270 top
J63  [1X07_NO_SILK]  65.02,85.85 0 top
J64  QWIIC_RIGHT_ANGLE  [JST04_1MM_RA]  104.88,97.28 90 top
J65  QWIIC_RIGHT_ANGLE  [JST04_1MM_RA]  89.66,97.28 270 top
J66  [1X07_NO_SILK]  90.93,85.85 0 top
J67  QWIIC_RIGHT_ANGLE  [JST04_1MM_RA]  130.78,97.28 90 top
J68  QWIIC_RIGHT_ANGLE  [JST04_1MM_RA]  115.57,97.28 270 top
J69  [1X07_NO_SILK]  116.84,85.85 0 top
J70  QWIIC_RIGHT_ANGLE  [JST04_1MM_RA]  156.69,97.28 90 top
J71  QWIIC_RIGHT_ANGLE  [JST04_1MM_RA]  141.48,97.28 270 top
J72  [1X07_NO_SILK]  142.75,85.85 0 top
LED  JUMPER-SMT_2_NC_TRACE_SILK  [SMT-JUMPER_2_NC_TRACE_SILK]  30.56,25.4 180 bottom
LED1  JUMPER-SMT_2_NC_TRACE_SILK  [SMT-JUMPER_2_NC_TRACE_SILK]  56.46,25.4 180 bottom
LED2  JUMPER-SMT_2_NC_TRACE_SILK  [SMT-JUMPER_2_NC_TRACE_SILK]  82.37,25.4 180 bottom
LED3  JUMPER-SMT_2_NC_TRACE_SILK  [SMT-JUMPER_2_NC_TRACE_SILK]  108.28,25.4 180 bottom
LED4  JUMPER-SMT_2_NC_TRACE_SILK  [SMT-JUMPER_2_NC_TRACE_SILK]  134.19,25.4 180 bottom
LED5  JUMPER-SMT_2_NC_TRACE_SILK  [SMT-JUMPER_2_NC_TRACE_SILK]  160.1,25.4 180 bottom
LED6  JUMPER-SMT_2_NC_TRACE_SILK  [SMT-JUMPER_2_NC_TRACE_SILK]  30.56,51.31 180 bottom
LED7  JUMPER-SMT_2_NC_TRACE_SILK  [SMT-JUMPER_2_NC_TRACE_SILK]  56.46,51.31 180 bottom
LED8  JUMPER-SMT_2_NC_TRACE_SILK  [SMT-JUMPER_2_NC_TRACE_SILK]  82.37,51.31 180 bottom
LED9  JUMPER-SMT_2_NC_TRACE_SILK  [SMT-JUMPER_2_NC_TRACE_SILK]  108.28,51.31 180 bottom
LED10  JUMPER-SMT_2_NC_TRACE_SILK  [SMT-JUMPER_2_NC_TRACE_SILK]  134.19,51.31 180 bottom
LED11  JUMPER-SMT_2_NC_TRACE_SILK  [SMT-JUMPER_2_NC_TRACE_SILK]  160.1,51.31 180 bottom
LED12  JUMPER-SMT_2_NC_TRACE_SILK  [SMT-JUMPER_2_NC_TRACE_SILK]  30.56,77.22 180 bottom
LED13  JUMPER-SMT_2_NC_TRACE_SILK  [SMT-JUMPER_2_NC_TRACE_SILK]  56.46,77.22 180 bottom
LED14  JUMPER-SMT_2_NC_TRACE_SILK  [SMT-JUMPER_2_NC_TRACE_SILK]  82.37,77.22 180 bottom
LED15  JUMPER-SMT_2_NC_TRACE_SILK  [SMT-JUMPER_2_NC_TRACE_SILK]  108.28,77.22 180 bottom
LED16  JUMPER-SMT_2_NC_TRACE_SILK  [SMT-JUMPER_2_NC_TRACE_SILK]  134.19,77.22 180 bottom
LED17  JUMPER-SMT_2_NC_TRACE_SILK  [SMT-JUMPER_2_NC_TRACE_SILK]  160.1,77.22 180 bottom
LED18  JUMPER-SMT_2_NC_TRACE_SILK  [SMT-JUMPER_2_NC_TRACE_SILK]  30.56,103.12 180 bottom
LED19  JUMPER-SMT_2_NC_TRACE_SILK  [SMT-JUMPER_2_NC_TRACE_SILK]  56.46,103.12 180 bottom
LED20  JUMPER-SMT_2_NC_TRACE_SILK  [SMT-JUMPER_2_NC_TRACE_SILK]  82.37,103.12 180 bottom
LED21  JUMPER-SMT_2_NC_TRACE_SILK  [SMT-JUMPER_2_NC_TRACE_SILK]  108.28,103.12 180 bottom
LED22  JUMPER-SMT_2_NC_TRACE_SILK  [SMT-JUMPER_2_NC_TRACE_SILK]  134.19,103.12 180 bottom
LED23  JUMPER-SMT_2_NC_TRACE_SILK  [SMT-JUMPER_2_NC_TRACE_SILK]  160.1,103.12 180 bottom
LOGO1  OSHW-LOGOMINI  [OSHW-LOGO-MINI]  56.54,21.57 0 bottom
LOGO2  OSHW-LOGOMINI  [OSHW-LOGO-MINI]  30.63,21.57 0 bottom
LOGO3  SFE_LOGO_NAME_FLAME.1_INCH  [SFE_LOGO_NAME_FLAME_.1]  19.52,15.57 0 bottom
LOGO4  QWIIC_LOGO_4MM  [QWIIC_4MM]  9.47,24.21 0 top
LOGO5  SFE_LOGO_NAME_FLAME.1_INCH  [SFE_LOGO_NAME_FLAME_.1]  45.42,15.57 0 bottom
LOGO6  QWIIC_LOGO_4MM  [QWIIC_4MM]  35.38,24.21 0 top
LOGO7  OSHW-LOGOMINI  [OSHW-LOGO-MINI]  82.45,21.57 0 bottom
LOGO8  SFE_LOGO_NAME_FLAME.1_INCH  [SFE_LOGO_NAME_FLAME_.1]  71.33,15.57 0 bottom
LOGO9  QWIIC_LOGO_4MM  [QWIIC_4MM]  61.29,24.21 0 top
LOGO10  OSHW-LOGOMINI  [OSHW-LOGO-MINI]  108.36,21.57 0 bottom
LOGO11  SFE_LOGO_NAME_FLAME.1_INCH  [SFE_LOGO_NAME_FLAME_.1]  97.24,15.57 0 bottom
LOGO12  QWIIC_LOGO_4MM  [QWIIC_4MM]  87.2,24.21 0 top
LOGO13  OSHW-LOGOMINI  [OSHW-LOGO-MINI]  134.26,21.57 0 bottom
LOGO14  SFE_LOGO_NAME_FLAME.1_INCH  [SFE_LOGO_NAME_FLAME_.1]  123.15,15.57 0 bottom
LOGO15  QWIIC_LOGO_4MM  [QWIIC_4MM]  113.11,24.21 0 top
LOGO16  OSHW-LOGOMINI  [OSHW-LOGO-MINI]  160.17,21.57 0 bottom
LOGO17  SFE_LOGO_NAME_FLAME.1_INCH  [SFE_LOGO_NAME_FLAME_.1]  149.06,15.57 0 bottom
LOGO18  QWIIC_LOGO_4MM  [QWIIC_4MM]  139.01,24.21 0 top
LOGO19  OSHW-LOGOMINI  [OSHW-LOGO-MINI]  30.63,47.48 0 bottom
LOGO20  SFE_LOGO_NAME_FLAME.1_INCH  [SFE_LOGO_NAME_FLAME_.1]  19.52,41.48 0 bottom
LOGO21  QWIIC_LOGO_4MM  [QWIIC_4MM]  9.47,50.11 0 top
LOGO22  OSHW-LOGOMINI  [OSHW-LOGO-MINI]  56.54,47.48 0 bottom
LOGO23  SFE_LOGO_NAME_FLAME.1_INCH  [SFE_LOGO_NAME_FLAME_.1]  45.42,41.48 0 bottom
LOGO24  QWIIC_LOGO_4MM  [QWIIC_4MM]  35.38,50.11 0 top
LOGO25  OSHW-LOGOMINI  [OSHW-LOGO-MINI]  82.45,47.48 0 bottom
LOGO26  SFE_LOGO_NAME_FLAME.1_INCH  [SFE_LOGO_NAME_FLAME_.1]  71.33,41.48 0 bottom
LOGO27  QWIIC_LOGO_4MM  [QWIIC_4MM]  61.29,50.11 0 top
LOGO28  OSHW-LOGOMINI  [OSHW-LOGO-MINI]  108.36,47.48 0 bottom
LOGO29  SFE_LOGO_NAME_FLAME.1_INCH  [SFE_LOGO_NAME_FLAME_.1]  97.24,41.48 0 bottom
LOGO30  QWIIC_LOGO_4MM  [QWIIC_4MM]  87.2,50.11 0 top
LOGO31  OSHW-LOGOMINI  [OSHW-LOGO-MINI]  134.26,47.48 0 bottom
LOGO32  SFE_LOGO_NAME_FLAME.1_INCH  [SFE_LOGO_NAME_FLAME_.1]  123.15,41.48 0 bottom
LOGO33  QWIIC_LOGO_4MM  [QWIIC_4MM]  113.11,50.11 0 top
LOGO34  OSHW-LOGOMINI  [OSHW-LOGO-MINI]  160.17,47.48 0 bottom
LOGO35  SFE_LOGO_NAME_FLAME.1_INCH  [SFE_LOGO_NAME_FLAME_.1]  149.06,41.48 0 bottom
LOGO36  QWIIC_LOGO_4MM  [QWIIC_4MM]  139.01,50.11 0 top
LOGO37  OSHW-LOGOMINI  [OSHW-LOGO-MINI]  30.63,73.39 0 bottom
LOGO38  SFE_LOGO_NAME_FLAME.1_INCH  [SFE_LOGO_NAME_FLAME_.1]  19.52,67.38 0 bottom
LOGO39  QWIIC_LOGO_4MM  [QWIIC_4MM]  9.47,76.02 0 top
LOGO40  OSHW-LOGOMINI  [OSHW-LOGO-MINI]  56.54,73.39 0 bottom
LOGO41  SFE_LOGO_NAME_FLAME.1_INCH  [SFE_LOGO_NAME_FLAME_.1]  45.42,67.38 0 bottom
LOGO42  QWIIC_LOGO_4MM  [QWIIC_4MM]  35.38,76.02 0 top
LOGO43  OSHW-LOGOMINI  [OSHW-LOGO-MINI]  82.45,73.39 0 bottom
LOGO44  SFE_LOGO_NAME_FLAME.1_INCH  [SFE_LOGO_NAME_FLAME_.1]  71.33,67.38 0 bottom
LOGO45  QWIIC_LOGO_4MM  [QWIIC_4MM]  61.29,76.02 0 top
LOGO46  OSHW-LOGOMINI  [OSHW-LOGO-MINI]  108.36,73.39 0 bottom
LOGO47  SFE_LOGO_NAME_FLAME.1_INCH  [SFE_LOGO_NAME_FLAME_.1]  97.24,67.38 0 bottom
LOGO48  QWIIC_LOGO_4MM  [QWIIC_4MM]  87.2,76.02 0 top
LOGO49  OSHW-LOGOMINI  [OSHW-LOGO-MINI]  134.26,73.39 0 bottom
LOGO50  SFE_LOGO_NAME_FLAME.1_INCH  [SFE_LOGO_NAME_FLAME_.1]  123.15,67.38 0 bottom
LOGO51  QWIIC_LOGO_4MM  [QWIIC_4MM]  113.11,76.02 0 top
LOGO52  OSHW-LOGOMINI  [OSHW-LOGO-MINI]  160.17,73.39 0 bottom
LOGO53  SFE_LOGO_NAME_FLAME.1_INCH  [SFE_LOGO_NAME_FLAME_.1]  149.06,67.38 0 bottom
LOGO54  QWIIC_LOGO_4MM  [QWIIC_4MM]  139.01,76.02 0 top
LOGO55  OSHW-LOGOMINI  [OSHW-LOGO-MINI]  30.63,99.29 0 bottom
LOGO56  SFE_LOGO_NAME_FLAME.1_INCH  [SFE_LOGO_NAME_FLAME_.1]  19.52,93.29 0 bottom
LOGO57  QWIIC_LOGO_4MM  [QWIIC_4MM]  9.47,101.93 0 top
LOGO58  OSHW-LOGOMINI  [OSHW-LOGO-MINI]  56.54,99.29 0 bottom
LOGO59  SFE_LOGO_NAME_FLAME.1_INCH  [SFE_LOGO_NAME_FLAME_.1]  45.42,93.29 0 bottom
LOGO60  QWIIC_LOGO_4MM  [QWIIC_4MM]  35.38,101.93 0 top
LOGO61  OSHW-LOGOMINI  [OSHW-LOGO-MINI]  82.45,99.29 0 bottom
LOGO62  SFE_LOGO_NAME_FLAME.1_INCH  [SFE_LOGO_NAME_FLAME_.1]  71.33,93.29 0 bottom
LOGO63  QWIIC_LOGO_4MM  [QWIIC_4MM]  61.29,101.93 0 top
LOGO64  OSHW-LOGOMINI  [OSHW-LOGO-MINI]  108.36,99.29 0 bottom
LOGO65  SFE_LOGO_NAME_FLAME.1_INCH  [SFE_LOGO_NAME_FLAME_.1]  97.24,93.29 0 bottom
LOGO66  QWIIC_LOGO_4MM  [QWIIC_4MM]  87.2,101.93 0 top
LOGO67  OSHW-LOGOMINI  [OSHW-LOGO-MINI]  134.26,99.29 0 bottom
LOGO68  SFE_LOGO_NAME_FLAME.1_INCH  [SFE_LOGO_NAME_FLAME_.1]  123.15,93.29 0 bottom
LOGO69  QWIIC_LOGO_4MM  [QWIIC_4MM]  113.11,101.93 0 top
LOGO70  OSHW-LOGOMINI  [OSHW-LOGO-MINI]  160.17,99.29 0 bottom
LOGO71  SFE_LOGO_NAME_FLAME.1_INCH  [SFE_LOGO_NAME_FLAME_.1]  149.06,93.29 0 bottom
LOGO72  QWIIC_LOGO_4MM  [QWIIC_4MM]  139.01,101.93 0 top
R1  2.2k  [0603]  18.8,23.62 90 top
R2  2.2k  [0603]  20.32,23.62 90 top
R3  10k  [0603]  24,24 0 top
R4  1k  [0603]  29.41,24.84 90 top
R5  2.2k  [0603]  44.7,23.62 90 top
R6  10k  [0603]  24,15.24 0 top
R7  10k  [0603]  15.11,24 0 top
R8  10k  [0603]  15.11,22.48 180 top
R9  2.2k  [0603]  46.23,23.62 90 top
R10  1k  [0603]  55.32,24.84 90 top
R11  10k  [0603]  49.91,24 0 top
R12  10k  [0603]  49.91,15.24 0 top
R13  10k  [0603]  41.02,24 0 top
R14  10k  [0603]  41.02,22.48 180 top
R15  2.2k  [0603]  70.61,23.62 90 top
R16  2.2k  [0603]  72.14,23.62 90 top
R17  1k  [0603]  81.23,24.84 90 top
R18  10k  [0603]  75.82,24 0 top
R19  10k  [0603]  75.82,15.24 0 top
R20  10k  [0603]  66.93,24 0 top
R21  10k  [0603]  66.93,22.48 180 top
R22  2.2k  [0603]  96.52,23.62 90 top
R23  2.2k  [0603]  98.04,23.62 90 top
R24  1k  [0603]  107.14,24.84 90 top
R25  10k  [0603]  101.73,24 0 top
R26  10k  [0603]  101.73,15.24 0 top
R27  10k  [0603]  92.84,24 0 top
R28  10k  [0603]  92.84,22.48 180 top
R29  2.2k  [0603]  122.43,23.62 90 top
R30  2.2k  [0603]  123.95,23.62 90 top
R31  1k  [0603]  133.05,24.84 90 top
R32  10k  [0603]  127.64,24 0 top
R33  10k  [0603]  127.64,15.24 0 top
R34  10k  [0603]  118.75,24 0 top
R35  10k  [0603]  118.75,22.48 180 top
R36  2.2k  [0603]  148.34,23.62 90 top
R37  2.2k  [0603]  149.86,23.62 90 top
R38  1k  [0603]  158.95,24.84 90 top
R39  10k  [0603]  153.54,24 0 top
R40  10k  [0603]  153.54,15.24 0 top
R41  10k  [0603]  144.65,24 0 top
R42  10k  [0603]  144.65,22.48 180 top
R43  2.2k  [0603]  18.8,49.53 90 top
R44  2.2k  [0603]  20.32,49.53 90 top
R45  1k  [0603]  29.41,50.75 90 top
R46  10k  [0603]  24,49.91 0 top
R47  10k  [0603]  24,41.15 0 top
R48  10k  [0603]  15.11,49.91 0 top
R49  10k  [0603]  15.11,48.39 180 top
R50  2.2k  [0603]  44.7,49.53 90 top
R51  2.2k  [0603]  46.23,49.53 90 top
R52  1k  [0603]  55.32,50.75 90 top
R53  10k  [0603]  49.91,49.91 0 top
R54  10k  [0603]  49.91,41.15 0 top
R55  10k  [0603]  41.02,49.91 0 top
R56  10k  [0603]  41.02,48.39 180 top
R57  2.2k  [0603]  70.61,49.53 90 top
R58  2.2k  [0603]  72.14,49.53 90 top
R59  1k  [0603]  81.23,50.75 90 top
R60  10k  [0603]  75.82,49.91 0 top
R61  10k  [0603]  75.82,41.15 0 top
R62  10k  [0603]  66.93,49.91 0 top
R63  10k  [0603]  66.93,48.39 180 top
R64  2.2k  [0603]  96.52,49.53 90 top
R65  2.2k  [0603]  98.04,49.53 90 top
R66  1k  [0603]  107.14,50.75 90 top
R67  10k  [0603]  101.73,49.91 0 top
R68  10k  [0603]  101.73,41.15 0 top
R69  10k  [0603]  92.84,49.91 0 top
R70  10k  [0603]  92.84,48.39 180 top
R71  2.2k  [0603]  122.43,49.53 90 top
R72  2.2k  [0603]  123.95,49.53 90 top
R73  1k  [0603]  133.05,50.75 90 top
R74  10k  [0603]  127.64,49.91 0 top
R75  10k  [0603]  127.64,41.15 0 top
R76  10k  [0603]  118.75,49.91 0 top
R77  10k  [0603]  118.75,48.39 180 top
R78  2.2k  [0603]  148.34,49.53 90 top
R79  2.2k  [0603]  149.86,49.53 90 top
R80  1k  [0603]  158.95,50.75 90 top
R81  10k  [0603]  153.54,49.91 0 top
R82  10k  [0603]  153.54,41.15 0 top
R83  10k  [0603]  144.65,49.91 0 top
R84  10k  [0603]  144.65,48.39 180 top
R85  2.2k  [0603]  18.8,75.44 90 top
R86  2.2k  [0603]  20.32,75.44 90 top
R87  1k  [0603]  29.41,76.66 90 top
R88  10k  [0603]  24,75.82 0 top
R89  10k  [0603]  24,67.06 0 top
R90  10k  [0603]  15.11,75.82 0 top
R91  10k  [0603]  15.11,74.3 180 top
R92  2.2k  [0603]  44.7,75.44 90 top
R93  2.2k  [0603]  46.23,75.44 90 top
R94  1k  [0603]  55.32,76.66 90 top
R95  10k  [0603]  49.91,75.82 0 top
R96  10k  [0603]  49.91,67.06 0 top
R97  10k  [0603]  41.02,75.82 0 top
R98  10k  [0603]  41.02,74.3 180 top
R99  2.2k  [0603]  70.61,75.44 90 top
R100  2.2k  [0603]  72.14,75.44 90 top
R101  1k  [0603]  81.23,76.66 90 top
R102  10k  [0603]  75.82,75.82 0 top
R103  10k  [0603]  75.82,67.06 0 top
R104  10k  [0603]  66.93,75.82 0 top
R105  10k  [0603]  66.93,74.3 180 top
R106  2.2k  [0603]  96.52,75.44 90 top
R107  2.2k  [0603]  98.04,75.44 90 top
R108  1k  [0603]  107.14,76.66 90 top
R109  10k  [0603]  101.73,75.82 0 top
R110  10k  [0603]  101.73,67.06 0 top
R111  10k  [0603]  92.84,75.82 0 top
R112  10k  [0603]  92.84,74.3 180 top
R113  2.2k  [0603]  122.43,75.44 90 top
R114  2.2k  [0603]  123.95,75.44 90 top
R115  1k  [0603]  133.05,76.66 90 top
R116  10k  [0603]  127.64,75.82 0 top
R117  10k  [0603]  127.64,67.06 0 top
R118  10k  [0603]  118.75,75.82 0 top
R119  10k  [0603]  118.75,74.3 180 top
R120  2.2k  [0603]  148.34,75.44 90 top
R121  2.2k  [0603]  149.86,75.44 90 top
R122  1k  [0603]  158.95,76.66 90 top
R123  10k  [0603]  153.54,75.82 0 top
R124  10k  [0603]  153.54,67.06 0 top
R125  10k  [0603]  144.65,75.82 0 top
R126  10k  [0603]  144.65,74.3 180 top
R127  2.2k  [0603]  18.8,101.35 90 top
R128  2.2k  [0603]  20.32,101.35 90 top
R129  1k  [0603]  29.41,102.57 90 top
R130  10k  [0603]  24,101.73 0 top
R131  10k  [0603]  24,92.96 0 top
R132  10k  [0603]  15.11,101.73 0 top
R133  10k  [0603]  15.11,100.2 180 top
R134  2.2k  [0603]  44.7,101.35 90 top
R135  2.2k  [0603]  46.23,101.35 90 top
R136  1k  [0603]  55.32,102.57 90 top
R137  10k  [0603]  49.91,101.73 0 top
R138  10k  [0603]  49.91,92.96 0 top
R139  10k  [0603]  41.02,101.73 0 top
R140  10k  [0603]  41.02,100.2 180 top
R141  2.2k  [0603]  70.61,101.35 90 top
R142  2.2k  [0603]  72.14,101.35 90 top
R143  1k  [0603]  81.23,102.57 90 top
R144  10k  [0603]  75.82,101.73 0 top
R145  10k  [0603]  75.82,92.96 0 top
R146  10k  [0603]  66.93,101.73 0 top
R147  10k  [0603]  66.93,100.2 180 top
R148  2.2k  [0603]  96.52,101.35 90 top
R149  2.2k  [0603]  98.04,101.35 90 top
R150  1k  [0603]  107.14,102.57 90 top
R151  10k  [0603]  101.73,101.73 0 top
R152  10k  [0603]  101.73,92.96 0 top
R153  10k  [0603]  92.84,101.73 0 top
R154  10k  [0603]  92.84,100.2 180 top
R155  2.2k  [0603]  122.43,101.35 90 top
R156  2.2k  [0603]  123.95,101.35 90 top
R157  1k  [0603]  133.05,102.57 90 top
R158  10k  [0603]  127.64,101.73 0 top
R159  10k  [0603]  127.64,92.96 0 top
R160  10k  [0603]  118.75,101.73 0 top
R161  10k  [0603]  118.75,100.2 180 top
R162  2.2k  [0603]  148.34,101.35 90 top
R163  2.2k  [0603]  149.86,101.35 90 top
R164  1k  [0603]  158.95,102.57 90 top
R165  10k  [0603]  153.54,101.73 0 top
R166  10k  [0603]  153.54,92.96 0 top
R167  10k  [0603]  144.65,101.73 0 top
R168  10k  [0603]  144.65,100.2 180 top
STANDOFF1  STAND-OFFTIGHT  [STAND-OFF-TIGHT]  9.4,29.72 0 top
STANDOFF2  STAND-OFFTIGHT  [STAND-OFF-TIGHT]  9.4,9.4 0 top
STANDOFF3  STAND-OFFTIGHT  [STAND-OFF-TIGHT]  35.31,29.72 0 top
STANDOFF4  STAND-OFFTIGHT  [STAND-OFF-TIGHT]  35.31,9.4 0 top
STANDOFF5  STAND-OFFTIGHT  [STAND-OFF-TIGHT]  29.72,29.72 0 top
STANDOFF6  STAND-OFFTIGHT  [STAND-OFF-TIGHT]  55.63,29.72 0 top
STANDOFF7  STAND-OFFTIGHT  [STAND-OFF-TIGHT]  61.21,29.72 0 top
STANDOFF8  STAND-OFFTIGHT  [STAND-OFF-TIGHT]  61.21,9.4 0 top
STANDOFF9  STAND-OFFTIGHT  [STAND-OFF-TIGHT]  81.53,29.72 0 top
STANDOFF10  STAND-OFFTIGHT  [STAND-OFF-TIGHT]  87.12,29.72 0 top
STANDOFF11  STAND-OFFTIGHT  [STAND-OFF-TIGHT]  87.12,9.4 0 top
STANDOFF12  STAND-OFFTIGHT  [STAND-OFF-TIGHT]  107.44,29.72 0 top
STANDOFF13  STAND-OFFTIGHT  [STAND-OFF-TIGHT]  113.03,29.72 0 top
STANDOFF14  STAND-OFFTIGHT  [STAND-OFF-TIGHT]  113.03,9.4 0 top
STANDOFF15  STAND-OFFTIGHT  [STAND-OFF-TIGHT]  133.35,29.72 0 top
STANDOFF16  STAND-OFFTIGHT  [STAND-OFF-TIGHT]  138.94,29.72 0 top
STANDOFF17  STAND-OFFTIGHT  [STAND-OFF-TIGHT]  138.94,9.4 0 top
STANDOFF18  STAND-OFFTIGHT  [STAND-OFF-TIGHT]  159.26,29.72 0 top
STANDOFF19  STAND-OFFTIGHT  [STAND-OFF-TIGHT]  9.4,55.63 0 top
STANDOFF20  STAND-OFFTIGHT  [STAND-OFF-TIGHT]  9.4,35.31 0 top
STANDOFF21  STAND-OFFTIGHT  [STAND-OFF-TIGHT]  29.72,55.63 0 top
STANDOFF22  STAND-OFFTIGHT  [STAND-OFF-TIGHT]  35.31,55.63 0 top
STANDOFF23  STAND-OFFTIGHT  [STAND-OFF-TIGHT]  35.31,35.31 0 top
STANDOFF24  STAND-OFFTIGHT  [STAND-OFF-TIGHT]  55.63,55.63 0 top
STANDOFF25  STAND-OFFTIGHT  [STAND-OFF-TIGHT]  61.21,55.63 0 top
STANDOFF26  STAND-OFFTIGHT  [STAND-OFF-TIGHT]  61.21,35.31 0 top
STANDOFF27  STAND-OFFTIGHT  [STAND-OFF-TIGHT]  81.53,55.63 0 top
STANDOFF28  STAND-OFFTIGHT  [STAND-OFF-TIGHT]  87.12,55.63 0 top
STANDOFF29  STAND-OFFTIGHT  [STAND-OFF-TIGHT]  87.12,35.31 0 top
STANDOFF30  STAND-OFFTIGHT  [STAND-OFF-TIGHT]  107.44,55.63 0 top
STANDOFF31  STAND-OFFTIGHT  [STAND-OFF-TIGHT]  113.03,55.63 0 top
STANDOFF32  STAND-OFFTIGHT  [STAND-OFF-TIGHT]  113.03,35.31 0 top
STANDOFF33  STAND-OFFTIGHT  [STAND-OFF-TIGHT]  133.35,55.63 0 top
STANDOFF34  STAND-OFFTIGHT  [STAND-OFF-TIGHT]  138.94,55.63 0 top
STANDOFF35  STAND-OFFTIGHT  [STAND-OFF-TIGHT]  138.94,35.31 0 top
STANDOFF36  STAND-OFFTIGHT  [STAND-OFF-TIGHT]  159.26,55.63 0 top
STANDOFF37  STAND-OFFTIGHT  [STAND-OFF-TIGHT]  9.4,81.53 0 top
STANDOFF38  STAND-OFFTIGHT  [STAND-OFF-TIGHT]  9.4,61.21 0 top
STANDOFF39  STAND-OFFTIGHT  [STAND-OFF-TIGHT]  29.72,81.53 0 top
STANDOFF40  STAND-OFFTIGHT  [STAND-OFF-TIGHT]  35.31,81.53 0 top
STANDOFF41  STAND-OFFTIGHT  [STAND-OFF-TIGHT]  35.31,61.21 0 top
STANDOFF42  STAND-OFFTIGHT  [STAND-OFF-TIGHT]  55.63,81.53 0 top
STANDOFF43  STAND-OFFTIGHT  [STAND-OFF-TIGHT]  61.21,81.53 0 top
STANDOFF44  STAND-OFFTIGHT  [STAND-OFF-TIGHT]  61.21,61.21 0 top
STANDOFF45  STAND-OFFTIGHT  [STAND-OFF-TIGHT]  81.53,81.53 0 top
STANDOFF46  STAND-OFFTIGHT  [STAND-OFF-TIGHT]  87.12,81.53 0 top
STANDOFF47  STAND-OFFTIGHT  [STAND-OFF-TIGHT]  87.12,61.21 0 top
STANDOFF48  STAND-OFFTIGHT  [STAND-OFF-TIGHT]  107.44,81.53 0 top
STANDOFF49  STAND-OFFTIGHT  [STAND-OFF-TIGHT]  113.03,81.53 0 top
STANDOFF50  STAND-OFFTIGHT  [STAND-OFF-TIGHT]  113.03,61.21 0 top
STANDOFF51  STAND-OFFTIGHT  [STAND-OFF-TIGHT]  133.35,81.53 0 top
STANDOFF52  STAND-OFFTIGHT  [STAND-OFF-TIGHT]  138.94,81.53 0 top
STANDOFF53  STAND-OFFTIGHT  [STAND-OFF-TIGHT]  138.94,61.21 0 top
STANDOFF54  STAND-OFFTIGHT  [STAND-OFF-TIGHT]  159.26,81.53 0 top
STANDOFF55  STAND-OFFTIGHT  [STAND-OFF-TIGHT]  9.4,107.44 0 top
STANDOFF56  STAND-OFFTIGHT  [STAND-OFF-TIGHT]  9.4,87.12 0 top
STANDOFF57  STAND-OFFTIGHT  [STAND-OFF-TIGHT]  29.72,107.44 0 top
STANDOFF58  STAND-OFFTIGHT  [STAND-OFF-TIGHT]  35.31,107.44 0 top
STANDOFF59  STAND-OFFTIGHT  [STAND-OFF-TIGHT]  35.31,87.12 0 top
STANDOFF60  STAND-OFFTIGHT  [STAND-OFF-TIGHT]  55.63,107.44 0 top
STANDOFF61  STAND-OFFTIGHT  [STAND-OFF-TIGHT]  61.21,107.44 0 top
STANDOFF62  STAND-OFFTIGHT  [STAND-OFF-TIGHT]  61.21,87.12 0 top
STANDOFF63  STAND-OFFTIGHT  [STAND-OFF-TIGHT]  81.53,107.44 0 top
STANDOFF64  STAND-OFFTIGHT  [STAND-OFF-TIGHT]  87.12,107.44 0 top
STANDOFF65  STAND-OFFTIGHT  [STAND-OFF-TIGHT]  87.12,87.12 0 top
STANDOFF66  STAND-OFFTIGHT  [STAND-OFF-TIGHT]  107.44,107.44 0 top
STANDOFF67  STAND-OFFTIGHT  [STAND-OFF-TIGHT]  113.03,107.44 0 top
STANDOFF68  STAND-OFFTIGHT  [STAND-OFF-TIGHT]  113.03,87.12 0 top
STANDOFF69  STAND-OFFTIGHT  [STAND-OFF-TIGHT]  133.35,107.44 0 top
STANDOFF70  STAND-OFFTIGHT  [STAND-OFF-TIGHT]  138.94,107.44 0 top
STANDOFF71  STAND-OFFTIGHT  [STAND-OFF-TIGHT]  138.94,87.12 0 top
STANDOFF72  STAND-OFFTIGHT  [STAND-OFF-TIGHT]  159.26,107.44 0 top
U1  AP2127K-1.8V  [SOT23-5]  24,19.56 180 top
U2  ENS-160  [LGA-9]  19.56,19.56 0 top
U3  ENS-160  [LGA-9]  45.47,19.56 0 top
U4  AP2127K-1.8V  [SOT23-5]  49.91,19.56 180 top
U5  ENS-160  [LGA-9]  71.37,19.56 0 top
U6  AP2127K-1.8V  [SOT23-5]  75.82,19.56 180 top
U7  ENS-160  [LGA-9]  97.28,19.56 0 top
U8  AP2127K-1.8V  [SOT23-5]  101.73,19.56 180 top
U9  ENS-160  [LGA-9]  123.19,19.56 0 top
U10  AP2127K-1.8V  [SOT23-5]  127.64,19.56 180 top
U11  ENS-160  [LGA-9]  149.1,19.56 0 top
U12  AP2127K-1.8V  [SOT23-5]  153.54,19.56 180 top
U13  ENS-160  [LGA-9]  19.56,45.47 0 top
U14  AP2127K-1.8V  [SOT23-5]  24,45.47 180 top
U15  ENS-160  [LGA-9]  45.47,45.47 0 top
U16  AP2127K-1.8V  [SOT23-5]  49.91,45.47 180 top
U17  ENS-160  [LGA-9]  71.37,45.47 0 top
U18  AP2127K-1.8V  [SOT23-5]  75.82,45.47 180 top
U19  ENS-160  [LGA-9]  97.28,45.47 0 top
U20  AP2127K-1.8V  [SOT23-5]  101.73,45.47 180 top
U21  ENS-160  [LGA-9]  123.19,45.47 0 top
U22  AP2127K-1.8V  [SOT23-5]  127.64,45.47 180 top
U23  ENS-160  [LGA-9]  149.1,45.47 0 top
U24  AP2127K-1.8V  [SOT23-5]  153.54,45.47 180 top
U25  ENS-160  [LGA-9]  19.56,71.37 0 top
U26  AP2127K-1.8V  [SOT23-5]  24,71.37 180 top
U27  ENS-160  [LGA-9]  45.47,71.37 0 top
U28  AP2127K-1.8V  [SOT23-5]  49.91,71.37 180 top
U29  ENS-160  [LGA-9]  71.37,71.37 0 top
U30  AP2127K-1.8V  [SOT23-5]  75.82,71.37 180 top
U31  ENS-160  [LGA-9]  97.28,71.37 0 top
U32  AP2127K-1.8V  [SOT23-5]  101.73,71.37 180 top
U33  ENS-160  [LGA-9]  123.19,71.37 0 top
U34  AP2127K-1.8V  [SOT23-5]  127.64,71.37 180 top
U35  ENS-160  [LGA-9]  149.1,71.37 0 top
U36  AP2127K-1.8V  [SOT23-5]  153.54,71.37 180 top
U37  ENS-160  [LGA-9]  19.56,97.28 0 top
U38  AP2127K-1.8V  [SOT23-5]  24,97.28 180 top
U39  ENS-160  [LGA-9]  45.47,97.28 0 top
U40  AP2127K-1.8V  [SOT23-5]  49.91,97.28 180 top
U41  ENS-160  [LGA-9]  71.37,97.28 0 top
U42  AP2127K-1.8V  [SOT23-5]  75.82,97.28 180 top
U43  ENS-160  [LGA-9]  97.28,97.28 0 top
U44  AP2127K-1.8V  [SOT23-5]  101.73,97.28 180 top
U45  ENS-160  [LGA-9]  123.19,97.28 0 top
U46  AP2127K-1.8V  [SOT23-5]  127.64,97.28 180 top
U47  ENS-160  [LGA-9]  149.1,97.28 0 top
U48  AP2127K-1.8V  [SOT23-5]  153.54,97.28 180 top
U$1  [#GND#3]  13.21,10.79 90 top
U$2  [#3V3#4]  15.75,10.67 90 top
U$3  [#SDA#5]  18.29,10.79 90 top
U$4  [#SCL#4]  20.83,10.67 90 top
U$5  [ENS16016]  19.56,27.94 0 bottom
U$6  [#ADDR#6]  19.56,20.57 0 bottom
U$7  [#SCLK#16021]  20.83,11.18 270 bottom
U$8  [#ADR#441018]  23.37,10.79 90 top
U$9  [#GND#3]  13.21,10.79 270 bottom
U$10  [#3V3#4]  15.75,10.67 270 bottom
U$11  [##INT##9]  28.45,10.54 270 bottom
U$12  [AIR_QUALITY441014]  19.56,30.99 0 bottom
U$13  [SENSOR441015]  19.56,29.59 0 bottom
U$14  [#0X53#16019]  16.26,22.1 0 bottom
U$15  [#0X52#16019]  22.86,21.84 0 bottom
U$16  [#LED#11]  30.48,23.85 0 bottom
U$17  [AIR_QUALITY441014]  19.56,30.99 0 top
U$18  [##INT##6]  28.45,10.54 90 top
U$19  [SENSOR441015]  19.56,29.72 0 top
U$20  [SFE_LOGO_FLAME_.1]  25.91,29.72 0 top
U$21  [PWR9]  28.07,24.89 90 top
U$22  [##CS##16019]  25.91,10.29 270 bottom
U$23  [#POCI#16020]  23.37,10.92 270 bottom
U$24  [#PICO#16021]  18.29,11.05 270 bottom
U$25  [#I2C#11]  19.56,24 0 bottom
U$26  [#LED#11]  56.39,23.85 0 bottom
U$27  [##CS##441016]  25.91,10.29 90 top
U$28  [ENS16016]  19.56,27.94 0 top
U$29  [#I2C#11]  45.47,24 0 bottom
U$30  [#GND#3]  39.12,10.79 90 top
U$31  [#3V3#4]  41.66,10.67 90 top
U$32  [#SDA#5]  44.2,10.79 90 top
U$33  [#SCL#4]  46.74,10.67 90 top
U$34  [#GND#3]  39.12,10.79 270 bottom
U$35  [#3V3#4]  41.66,10.67 270 bottom
U$36  [##INT##6]  54.36,10.54 90 top
U$37  [##INT##9]  54.36,10.54 270 bottom
U$38  [AIR_QUALITY441014]  45.47,30.99 0 bottom
U$39  [SENSOR441015]  45.47,29.59 0 bottom
U$40  [AIR_QUALITY441014]  45.47,30.99 0 top
U$41  [SENSOR441015]  45.47,29.72 0 top
U$42  [SFE_LOGO_FLAME_.1]  51.82,29.72 0 top
U$43  [PWR9]  53.97,24.89 90 top
U$44  [ENS16016]  45.47,27.94 0 bottom
U$45  [#ADDR#6]  45.47,20.57 0 bottom
U$46  [#0X53#16019]  42.16,22.1 0 bottom
U$47  [#0X52#16019]  48.77,21.84 0 bottom
U$48  [##CS##16019]  51.82,10.29 270 bottom
U$49  [#SCLK#16021]  46.74,11.18 270 bottom
U$50  [##CS##441016]  51.82,10.29 90 top
U$51  [ENS16016]  45.47,27.94 0 top
U$52  [#ADR#441018]  49.28,10.79 90 top
U$53  [#POCI#16020]  49.28,10.92 270 bottom
U$54  [#PICO#16021]  44.2,11.05 270 bottom
U$55  [#LED#11]  82.3,23.85 0 bottom
U$56  [#I2C#11]  71.37,24 0 bottom
U$57  [#GND#3]  65.02,10.79 90 top
U$58  [#3V3#4]  67.56,10.67 90 top
U$59  [#SDA#5]  70.1,10.79 90 top
U$60  [#SCL#4]  72.64,10.67 90 top
U$61  [#GND#3]  65.02,10.79 270 bottom
U$62  [#3V3#4]  67.56,10.67 270 bottom
U$63  [##INT##6]  80.26,10.54 90 top
U$64  [##INT##9]  80.26,10.54 270 bottom
U$65  [AIR_QUALITY441014]  71.37,30.99 0 bottom
U$66  [SENSOR441015]  71.37,29.59 0 bottom
U$67  [AIR_QUALITY441014]  71.37,30.99 0 top
U$68  [SENSOR441015]  71.37,29.72 0 top
U$69  [SFE_LOGO_FLAME_.1]  77.72,29.72 0 top
U$70  [PWR9]  79.88,24.89 90 top
U$71  [ENS16016]  71.37,27.94 0 bottom
U$72  [#ADDR#6]  71.37,20.57 0 bottom
U$73  [#0X53#16019]  68.07,22.1 0 bottom
U$74  [#0X52#16019]  74.68,21.84 0 bottom
U$75  [##CS##16019]  77.72,10.29 270 bottom
U$76  [#SCLK#16021]  72.64,11.18 270 bottom
U$77  [##CS##441016]  77.72,10.29 90 top
U$78  [ENS16016]  71.37,27.94 0 top
U$79  [#ADR#441018]  75.18,10.79 90 top
U$80  [#POCI#16020]  75.18,10.92 270 bottom
U$81  [#PICO#16021]  70.1,11.05 270 bottom
U$82  [#LED#11]  108.2,23.85 0 bottom
U$83  [#I2C#11]  97.28,24 0 bottom
U$84  [#GND#3]  90.93,10.79 90 top
U$85  [#3V3#4]  93.47,10.67 90 top
U$86  [#SDA#5]  96.01,10.79 90 top
U$87  [#SCL#4]  98.55,10.67 90 top
U$88  [#GND#3]  90.93,10.79 270 bottom
U$89  [#3V3#4]  93.47,10.67 270 bottom
U$90  [##INT##6]  106.17,10.54 90 top
U$91  [##INT##9]  106.17,10.54 270 bottom
U$92  [AIR_QUALITY441014]  97.28,30.99 0 bottom
U$93  [SENSOR441015]  97.28,29.59 0 bottom
U$94  [AIR_QUALITY441014]  97.28,30.99 0 top
U$95  [SENSOR441015]  97.28,29.72 0 top
U$96  [SFE_LOGO_FLAME_.1]  103.63,29.72 0 top
U$97  [PWR9]  105.79,24.89 90 top
U$98  [ENS16016]  97.28,27.94 0 bottom
U$99  [#ADDR#6]  97.28,20.57 0 bottom
U$100  [#0X53#16019]  93.98,22.1 0 bottom
U$101  [#0X52#16019]  100.58,21.84 0 bottom
U$102  [##CS##16019]  103.63,10.29 270 bottom
U$103  [#SCLK#16021]  98.55,11.18 270 bottom
U$104  [##CS##441016]  103.63,10.29 90 top
U$105  [ENS16016]  97.28,27.94 0 top
U$106  [#ADR#441018]  101.09,10.79 90 top
U$107  [#POCI#16020]  101.09,10.92 270 bottom
U$108  [#PICO#16021]  96.01,11.05 270 bottom
U$109  [#LED#11]  134.11,23.85 0 bottom
U$110  [#I2C#11]  123.19,24 0 bottom
U$111  [#GND#3]  116.84,10.79 90 top
U$112  [#3V3#4]  119.38,10.67 90 top
U$113  [#SDA#5]  121.92,10.79 90 top
U$114  [#SCL#4]  124.46,10.67 90 top
U$115  [#GND#3]  116.84,10.79 270 bottom
U$116  [#3V3#4]  119.38,10.67 270 bottom
U$117  [##INT##6]  132.08,10.54 90 top
U$118  [##INT##9]  132.08,10.54 270 bottom
U$119  [AIR_QUALITY441014]  123.19,30.99 0 bottom
U$120  [SENSOR441015]  123.19,29.59 0 bottom
U$121  [AIR_QUALITY441014]  123.19,30.99 0 top
U$122  [SENSOR441015]  123.19,29.72 0 top
U$123  [SFE_LOGO_FLAME_.1]  129.54,29.72 0 top
U$124  [PWR9]  131.7,24.89 90 top
U$125  [ENS16016]  123.19,27.94 0 bottom
U$126  [#ADDR#6]  123.19,20.57 0 bottom
U$127  [#0X53#16019]  119.89,22.1 0 bottom
U$128  [#0X52#16019]  126.49,21.84 0 bottom
U$129  [##CS##16019]  129.54,10.29 270 bottom
U$130  [#SCLK#16021]  124.46,11.18 270 bottom
U$131  [##CS##441016]  129.54,10.29 90 top
U$132  [ENS16016]  123.19,27.94 0 top
U$133  [#ADR#441018]  127,10.79 90 top
U$134  [#POCI#16020]  127,10.92 270 bottom
U$135  [#PICO#16021]  121.92,11.05 270 bottom
U$136  [#LED#11]  160.02,23.85 0 bottom
U$137  [#I2C#11]  149.1,24 0 bottom
U$138  [#GND#3]  142.75,10.79 90 top
U$139  [#3V3#4]  145.29,10.67 90 top
U$140  [#SDA#5]  147.83,10.79 90 top
U$141  [#SCL#4]  150.37,10.67 90 top
U$142  [#GND#3]  142.75,10.79 270 bottom
U$143  [#3V3#4]  145.29,10.67 270 bottom
U$144  [##INT##6]  157.99,10.54 90 top
U$145  [##INT##9]  157.99,10.54 270 bottom
U$146  [AIR_QUALITY441014]  149.1,30.99 0 bottom
U$147  [SENSOR441015]  149.1,29.59 0 bottom
U$148  [AIR_QUALITY441014]  149.1,30.99 0 top
U$149  [SENSOR441015]  149.1,29.72 0 top
U$150  [SFE_LOGO_FLAME_.1]  155.45,29.72 0 top
U$151  [PWR9]  157.61,24.89 90 top
U$152  [ENS16016]  149.1,27.94 0 bottom
U$153  [#ADDR#6]  149.1,20.57 0 bottom
U$154  [#0X53#16019]  145.8,22.1 0 bottom
U$155  [#0X52#16019]  152.4,21.84 0 bottom
U$156  [##CS##16019]  155.45,10.29 270 bottom
U$157  [#SCLK#16021]  150.37,11.18 270 bottom
U$158  [##CS##441016]  155.45,10.29 90 top
U$159  [ENS16016]  149.1,27.94 0 top
U$160  [#ADR#441018]  152.91,10.79 90 top
U$161  [#POCI#16020]  152.91,10.92 270 bottom
U$162  [#PICO#16021]  147.83,11.05 270 bottom
U$163  [#LED#11]  30.48,49.76 0 bottom
U$164  [#I2C#11]  19.56,49.91 0 bottom
U$165  [#GND#3]  13.21,36.7 90 top
U$166  [#3V3#4]  15.75,36.58 90 top
U$167  [#SDA#5]  18.29,36.7 90 top
U$168  [#SCL#4]  20.83,36.58 90 top
U$169  [#GND#3]  13.21,36.7 270 bottom
U$170  [#3V3#4]  15.75,36.58 270 bottom
U$171  [##INT##6]  28.45,36.45 90 top
U$172  [##INT##9]  28.45,36.45 270 bottom
U$173  [AIR_QUALITY441014]  19.56,56.9 0 bottom
U$174  [SENSOR441015]  19.56,55.5 0 bottom
U$175  [AIR_QUALITY441014]  19.56,56.9 0 top
U$176  [SENSOR441015]  19.56,55.63 0 top
U$177  [SFE_LOGO_FLAME_.1]  25.91,55.63 0 top
U$178  [PWR9]  28.07,50.8 90 top
U$179  [ENS16016]  19.56,53.85 0 bottom
U$180  [#ADDR#6]  19.56,46.48 0 bottom
U$181  [#0X53#16019]  16.26,48.01 0 bottom
U$182  [#0X52#16019]  22.86,47.75 0 bottom
U$183  [##CS##16019]  25.91,36.2 270 bottom
U$184  [#SCLK#16021]  20.83,37.08 270 bottom
U$185  [##CS##441016]  25.91,36.2 90 top
U$186  [ENS16016]  19.56,53.85 0 top
U$187  [#ADR#441018]  23.37,36.7 90 top
U$188  [#POCI#16020]  23.37,36.83 270 bottom
U$189  [#PICO#16021]  18.29,36.96 270 bottom
U$190  [#LED#11]  56.39,49.76 0 bottom
U$191  [#I2C#11]  45.47,49.91 0 bottom
U$192  [#GND#3]  39.12,36.7 90 top
U$193  [#3V3#4]  41.66,36.58 90 top
U$194  [#SDA#5]  44.2,36.7 90 top
U$195  [#SCL#4]  46.74,36.58 90 top
U$196  [#GND#3]  39.12,36.7 270 bottom
U$197  [#3V3#4]  41.66,36.58 270 bottom
U$198  [##INT##6]  54.36,36.45 90 top
U$199  [##INT##9]  54.36,36.45 270 bottom
U$200  [AIR_QUALITY441014]  45.47,56.9 0 bottom
U$201  [SENSOR441015]  45.47,55.5 0 bottom
U$202  [AIR_QUALITY441014]  45.47,56.9 0 top
U$203  [SENSOR441015]  45.47,55.63 0 top
U$204  [SFE_LOGO_FLAME_.1]  51.82,55.63 0 top
U$205  [PWR9]  53.97,50.8 90 top
U$206  [ENS16016]  45.47,53.85 0 bottom
U$207  [#ADDR#6]  45.47,46.48 0 bottom
U$208  [#0X53#16019]  42.16,48.01 0 bottom
U$209  [#0X52#16019]  48.77,47.75 0 bottom
U$210  [##CS##16019]  51.82,36.2 270 bottom
U$211  [#SCLK#16021]  46.74,37.08 270 bottom
U$212  [##CS##441016]  51.82,36.2 90 top
U$213  [ENS16016]  45.47,53.85 0 top
U$214  [#ADR#441018]  49.28,36.7 90 top
U$215  [#POCI#16020]  49.28,36.83 270 bottom
U$216  [#PICO#16021]  44.2,36.96 270 bottom
U$217  [#LED#11]  82.3,49.76 0 bottom
U$218  [#I2C#11]  71.37,49.91 0 bottom
U$219  [#GND#3]  65.02,36.7 90 top
U$220  [#3V3#4]  67.56,36.58 90 top
U$221  [#SDA#5]  70.1,36.7 90 top
U$222  [#SCL#4]  72.64,36.58 90 top
U$223  [#GND#3]  65.02,36.7 270 bottom
U$224  [#3V3#4]  67.56,36.58 270 bottom
U$225  [##INT##6]  80.26,36.45 90 top
U$226  [##INT##9]  80.26,36.45 270 bottom
U$227  [AIR_QUALITY441014]  71.37,56.9 0 bottom
U$228  [SENSOR441015]  71.37,55.5 0 bottom
U$229  [AIR_QUALITY441014]  71.37,56.9 0 top
U$230  [SENSOR441015]  71.37,55.63 0 top
U$231  [SFE_LOGO_FLAME_.1]  77.72,55.63 0 top
U$232  [PWR9]  79.88,50.8 90 top
U$233  [ENS16016]  71.37,53.85 0 bottom
U$234  [#ADDR#6]  71.37,46.48 0 bottom
U$235  [#0X53#16019]  68.07,48.01 0 bottom
U$236  [#0X52#16019]  74.68,47.75 0 bottom
U$237  [##CS##16019]  77.72,36.2 270 bottom
U$238  [#SCLK#16021]  72.64,37.08 270 bottom
U$239  [##CS##441016]  77.72,36.2 90 top
U$240  [ENS16016]  71.37,53.85 0 top
U$241  [#ADR#441018]  75.18,36.7 90 top
U$242  [#POCI#16020]  75.18,36.83 270 bottom
U$243  [#PICO#16021]  70.1,36.96 270 bottom
U$244  [#LED#11]  108.2,49.76 0 bottom
U$245  [#I2C#11]  97.28,49.91 0 bottom
U$246  [#GND#3]  90.93,36.7 90 top
U$247  [#3V3#4]  93.47,36.58 90 top